# Altium PCB PS Digital Test v1.0.PcbDoc (part 1 of 3)
Units mil, origin at the board's own origin, x right, y up, seen from the top; angles counter-clockwise.
Board outline 3937.01 x 3937.01 mil, 4 copper layers (Top Layer, Signal Layer 1, Signal Layer 2, Bottom Layer), stack 55.634 mil thick; 120 components, 122 nets, 566 pads, 362 vias.
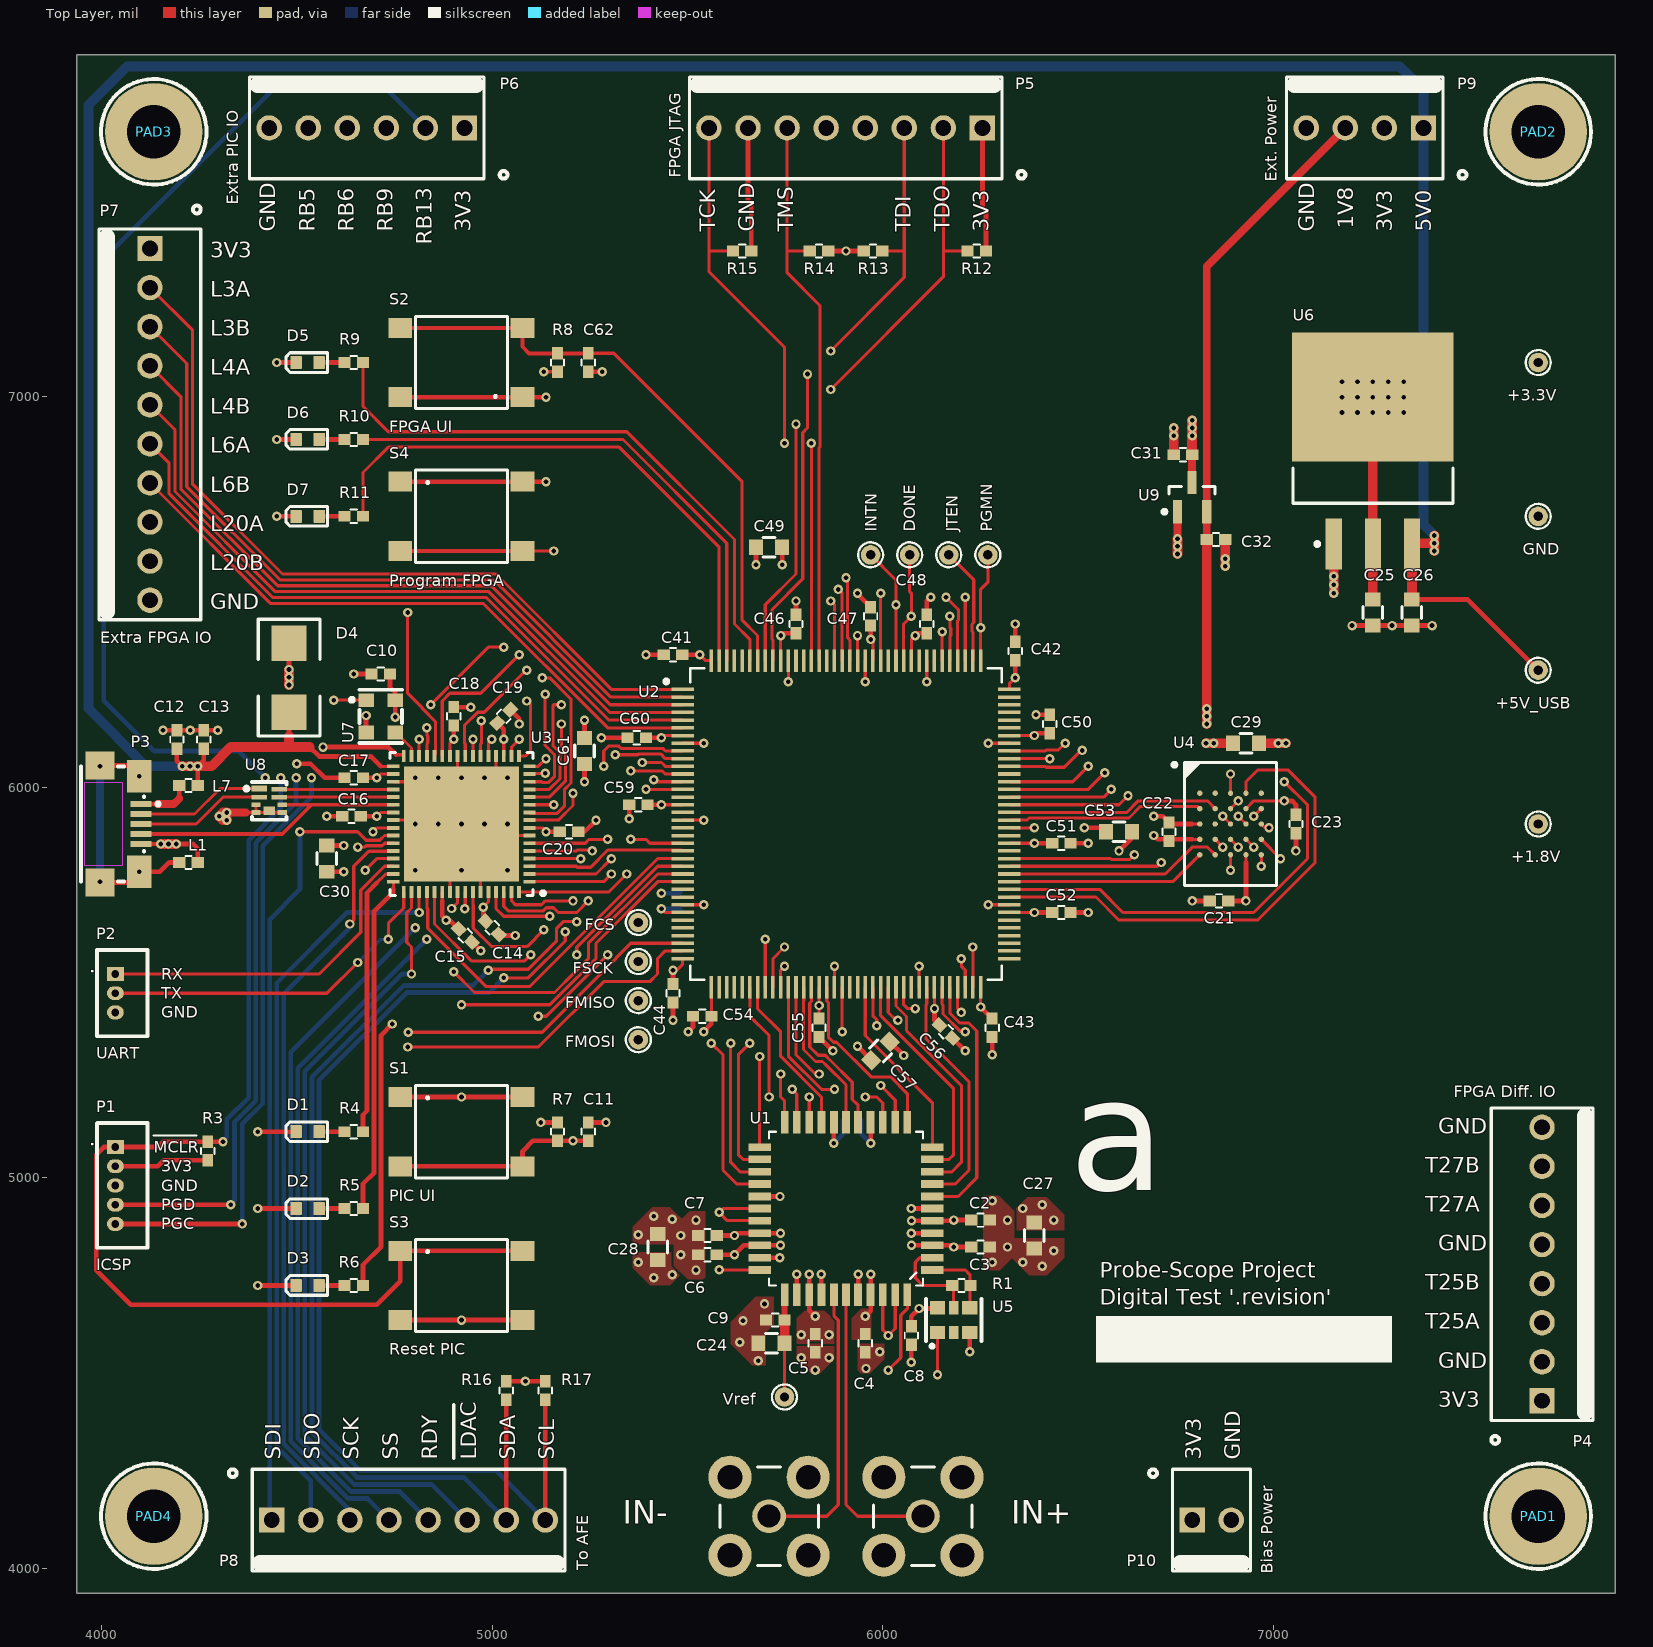
[diagram p0: Top Layer view]
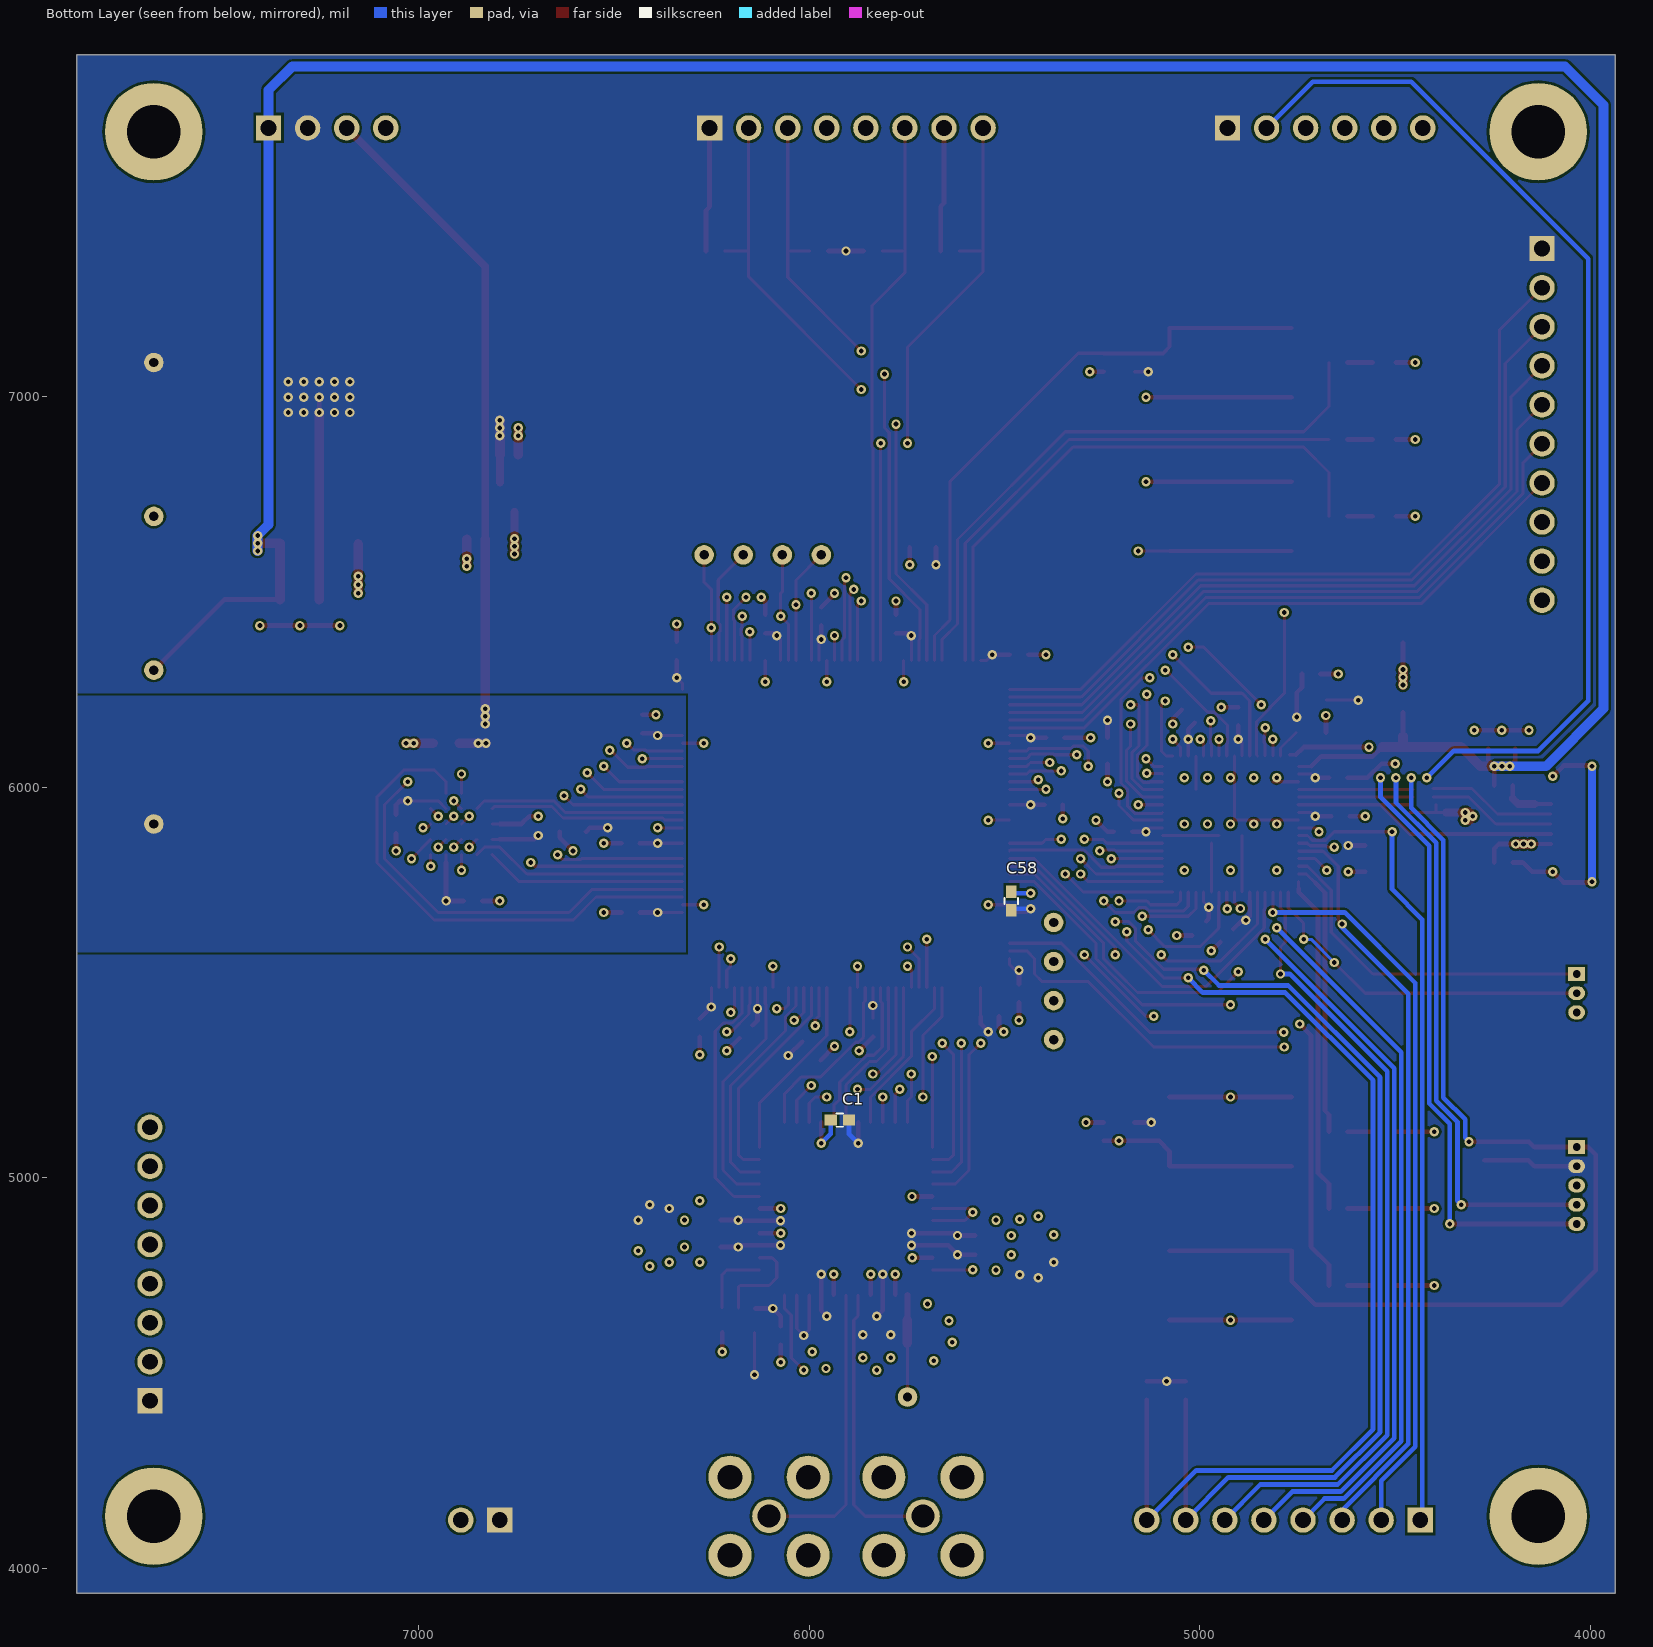
[diagram p1: Bottom Layer view, seen from below]
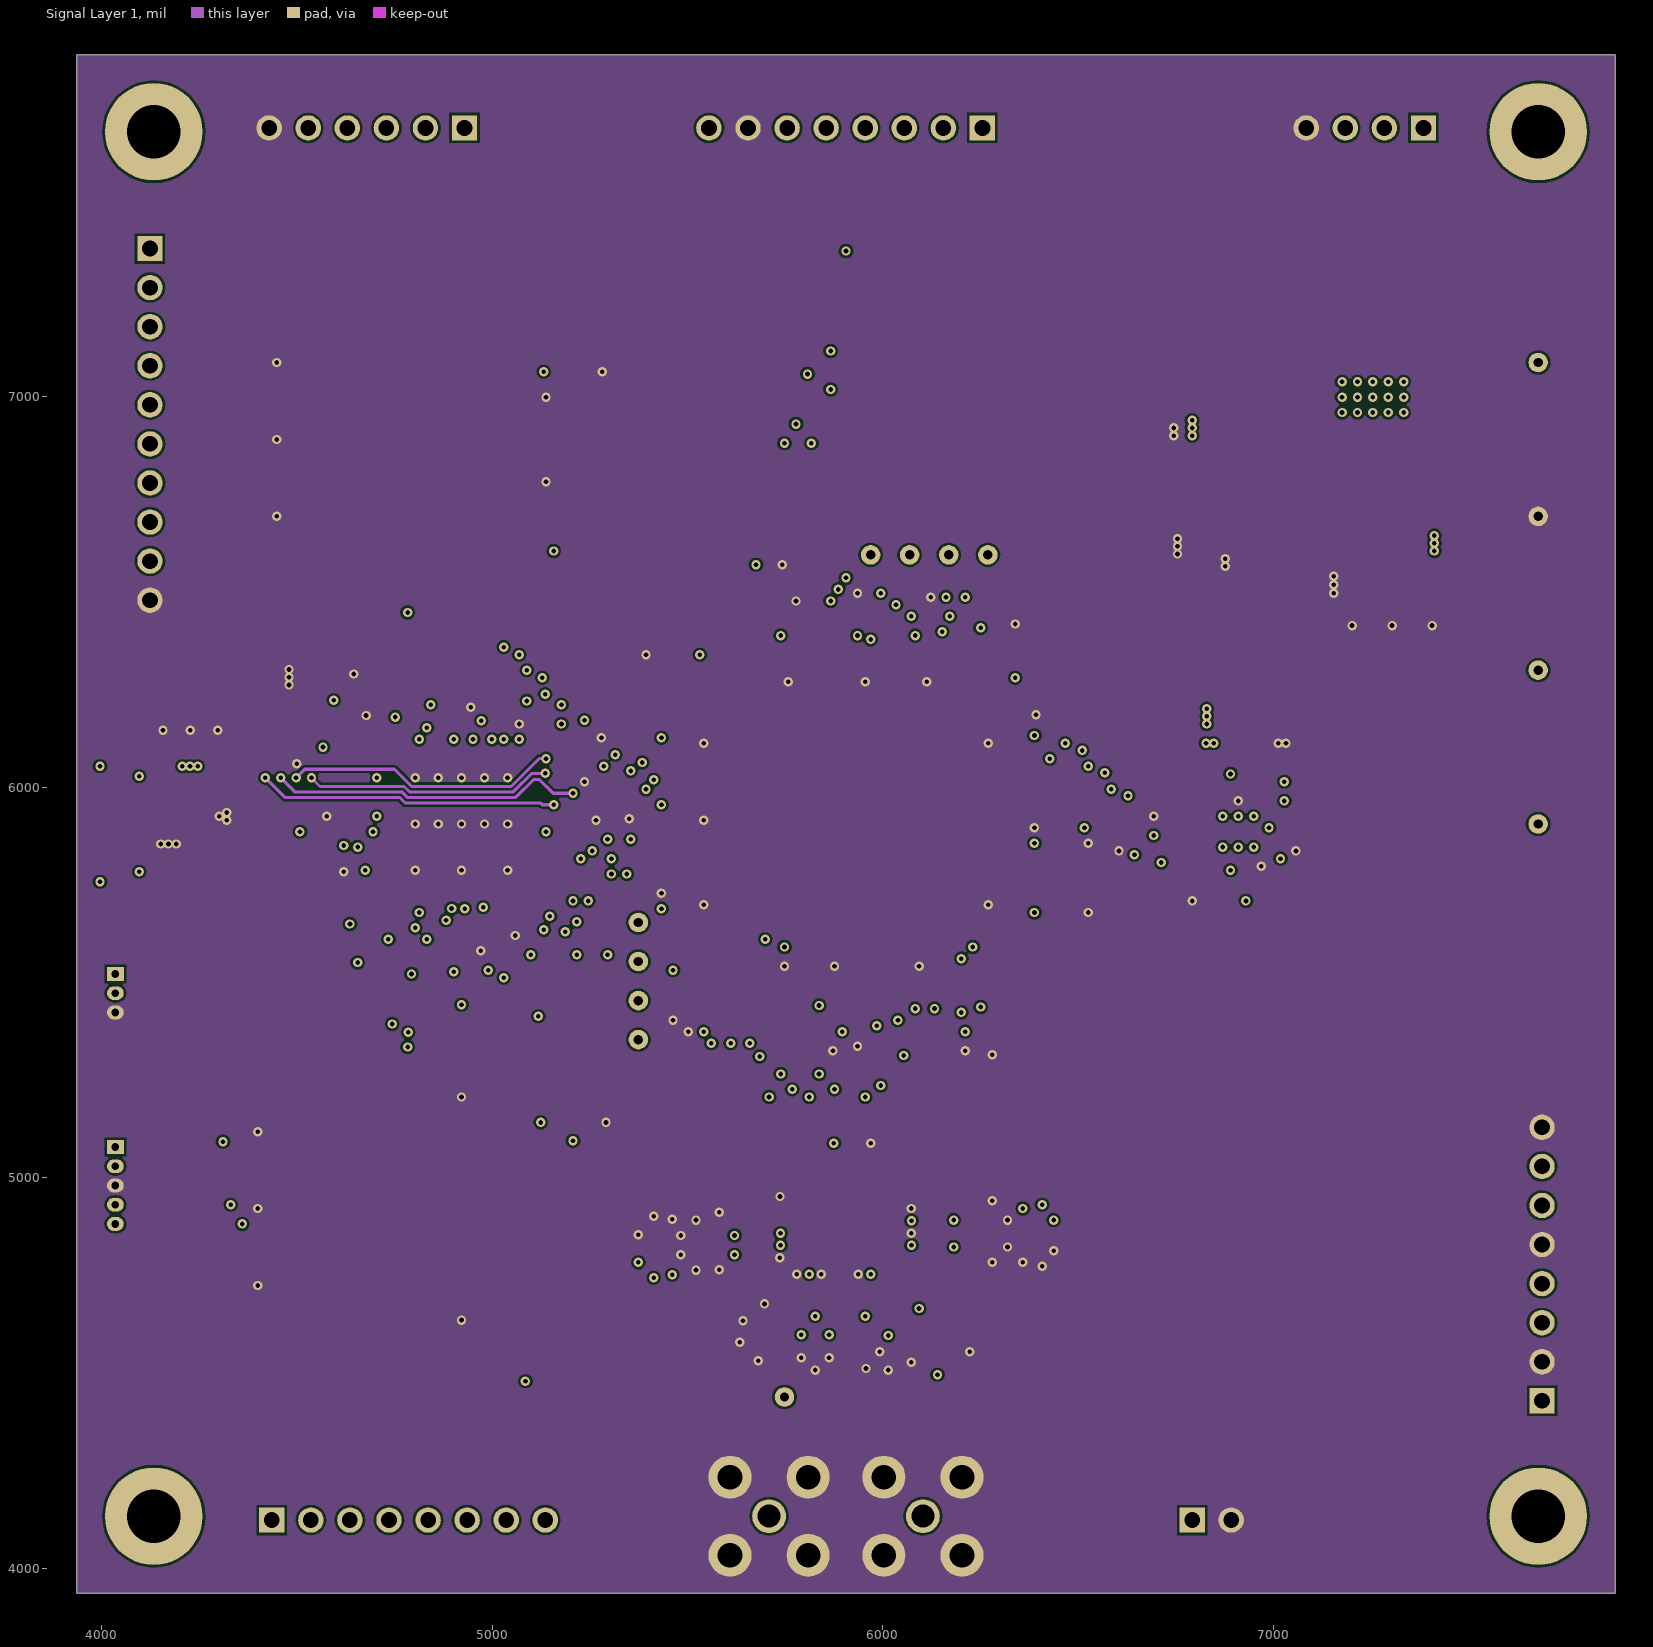
[diagram p2: Signal Layer 1]
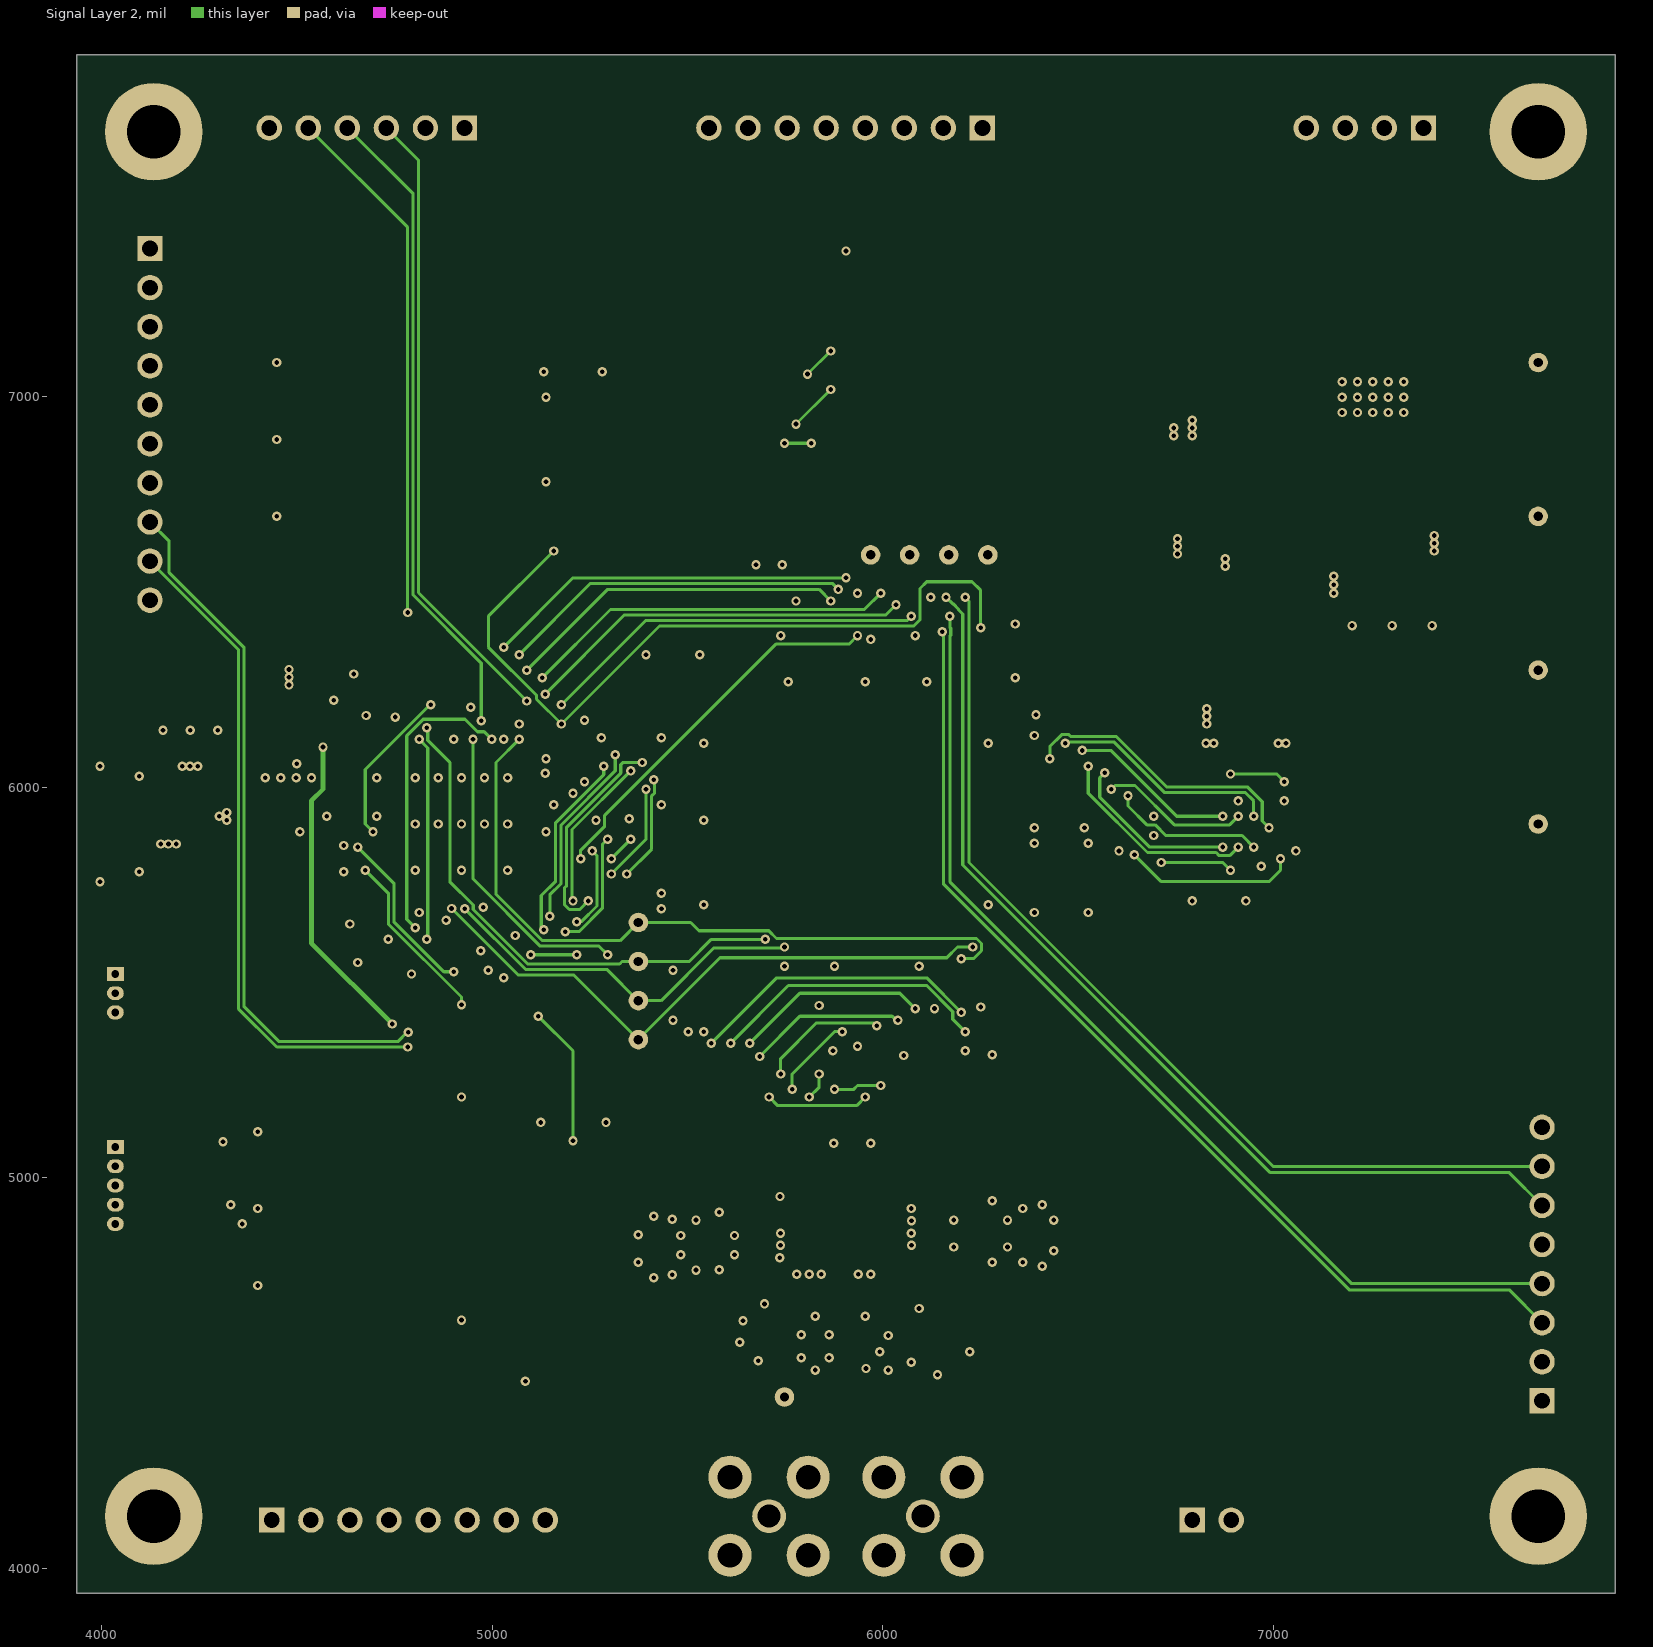
[diagram p3: Signal Layer 2]

## Layer stack, top to bottom
Top Solder: solder mask 0.4, Solder Resist, Dk 3.5
Top Layer: signal copper 1.4
Dielectric 1: prepreg 5, Dk 4.2
Signal Layer 1: signal copper 1.417
Dielectric 3: core 40, FR-4, Dk 4.2
Signal Layer 2: signal copper 1.417
Dielectric 2: prepreg 5, Dk 4.2
Bottom Layer: signal copper 1.4
Bottom Solder: solder mask 0.4, Solder Resist, Dk 3.5

## Board outline
3937.01,3937.01 7874.02,3937.01 7874.02,7874.02 3937.01,7874.02

## Design rules (kind name [scope] priority, off if disabled: settings)
Clearance BGAClearance [All vs HasFootprint('Cypress-VAA024')] p1: gap=7.88 ignorepadtopadclearanceinfootprint=FALSE except(0: Arc-Hole Track-Hole SMDPad-Hole THPad-Hole Via-Hole Fill-Hole Poly-Hole Region-Hole Text-Hole; 13.79: SMDPad-SMDPad)
Clearance [All] p2: gap=6 ignorepadtopadclearanceinfootprint=FALSE except(0: Arc-Hole Track-Hole SMDPad-Hole THPad-Hole Via-Hole Fill-Hole Poly-Hole Region-Hole Text-Hole)
DiffPairsRouting [All] p1: maxlimit=10 minlimit=6 mostfreqgap=8 toplayer_minwidth=6 toplayer_maxwidth=15 toplayer_prefwidth=8 midlayer1_minwidth=6 midlayer1_maxwidth=15 midlayer1_prefwidth=8 midlayer2_minwidth=6 midlayer2_maxwidth=15 midlayer2_prefwidth=8 bottomlayer_minwidth=6 bottomlayer_maxwidth=15 bottomlayer_prefwidth=8 maxuncoupledlength=500
HoleSize [All] p1: absolutevalues=TRUE maxlimit=200 minlimit=12 maxpercent=80.000 minpercent=20.000
HoleToHoleClearance ViaToViaClearance [IsVia vs IsVia] p1: gap=6 allowstackedmicrovias=TRUE
HoleToHoleClearance [All] p2: gap=10 allowstackedmicrovias=TRUE
PolygonConnect [All] p1: connectstyle=Direct reliefconductorwidth=10 reliefentries=4 polygonreliefangle="90 Angle" airgapwidth=10
RoutingVias [All] p1: holewidth=12 width=24 viastyle="Through Hole" minholewidth=12 minwidth=24 maxholewidth=28 maxwidth=50
SolderMaskExpansion [All] p1: expansion=4
Width [All] p1: maxlimit=100 minlimit=6 preferedwidth=8
27 further rules are at their usual default settings.

## Classes and differential pairs
net class "MEMDDR - 150mil": MEM_C\S\ MEM_CK_N MEM_CK_P MEM_D0 MEM_D1 MEM_D2 MEM_D3 MEM_D4 MEM_D5 MEM_D6 MEM_D7 MEM_PSC_N MEM_PSC_P MEM_R\E\S\E\T\ MEM_RWDS
net class "ADC_OSC - 37.5mil": ADC_OSC_N ADC_OSC_P
net class "ADC_CLK - 37.5mil": ADC_D1B ADC_DCO_N ADC_DCO_P
net class "ADC_DATA - 150mil": ADC_D0A ADC_D0B ADC_D1A ADC_D1B ADC_D2A ADC_D2B ADC_D3A ADC_D3B ADC_D4A ADC_D4B ADC_D5A ADC_D5B ADC_D6A ADC_D6B ADC_D7A ADC_D7B ADC_DCO_N ADC_DCO_P
component class "PSDT ADC v1.0.0": C1 C2 C3 C4 C5 C6 C7 C8 C9 C24 C27 C28 IN+ IN- R1 U1 U2 U5 Vref
component class "PSDT Controller v1.0.0": C10 C11 C12 C13 C14 C15 C16 C17 C18 C19 C20 C30 C62 D1 D2 D3 D5 D6 D7 DONE FCS FMISO FMOSI FSCK INTN JTEN L1 L7 P1 P2 P3 P4 P5 P6 P7 P8 PGMN R3 R4 R5 R6 R7 R8 R9 R10 R11 R12 R13 R14 R15 R16 R17 S1 S2 S3 S4 U3 U7 U8
component class "PSDT RAM v1.0.0": C21 C22 C23 C29 U4
component class "PSDT Power v1.0.0": +1.8V +3.3V +5V_USB C25 C26 C31 C32 C41 C42 C43 C44 C46 C47 C48 C49 C50 C51 C52 C53 C54 C55 C56 C57 C58 C59 C60 C61 D4 GND P9 P10 PAD1 PAD2 PAD3 PAD4 U6 U9
differential pair ADC_OSC: +ADC_OSC_P -ADC_OSC_N
differential pair ADC_IN: +ADC_IN_P -ADC_IN_N
differential pair ADC_DCO: +ADC_DCO_P -ADC_DCO_N
differential pair FDIO0: +FDIO0_P -FDIO0_N
differential pair FDIO1: +FDIO1_P -FDIO1_N

## Components (designator, comment, footprint, x,y, rotation, side; value= is the part's Value field where it differs from the comment)
+1.8V "TP" TESTPOINT024 7677.17,5905.51 r90 top
+3.3V "TP" TESTPOINT024 7677.17,7086.61 r90 top
+5V_USB "TP" TESTPOINT024 7677.17,6299.21 r90 top
C1 "6.3V" 0402(1005) 5921.26,5147.64 r180 bottom value=0.1uF
C2 "6.3V" 0402(1005) 6250,4891.73 r180 top value=0.1uF
C3 "6.3V" 0402(1005) 6250,4822.83 r180 top value=0.1uF
C4 "6.3V" 0402(1005) 5954.72,4576.77 r90 top value=0.1uF
C5 "6.3V" 0402(1005) 5826.77,4576.77 r90 top value=0.1uF
C6 "6.3V" 0402(1005) 5551.18,4803.15 r0 top value=0.1uF
C7 "6.3V" 0402(1005) 5551.18,4852.36 r0 top value=0.1uF
C8 "6.3V" 0402(1005) 6072.83,4596.46 r90 top value=0.1uF
C9 "6.3V" 0402(1005) 5724.41,4635.83 r0 top value=0.1uF
C10 "6.3V" 0402(1005) 4714.57,6289.37 r0 top value=0.1uF
C11 "6.3V" 0402(1005) 5246.06,5118.11 r270 top value=0.1uF
C12 "10V" 0402(1005) 4192.91,6122.05 r270 top value=1uF
C13 "6.3V" 0402(1005) 4261.81,6122.05 r270 top value=0.1uF
C14 "6.3V" 0402(1005) 5000,5639.76 r135 top value=0.1uF
C15 "6.3V" 0402(1005) 4931.1,5620.08 r135 top value=0.1uF
C16 "6.3V" 0402(1005) 4639.76,5925.2 r0 top value=0.1uF
C17 "6.3V" 0402(1005) 4645.67,6023.62 r0 top value=0.1uF
C18 "6.3V" 0402(1005) 4901.57,6181.1 r270 top value=0.1uF
C19 "6.3V" 0402(1005) 5029.53,6181.1 r225 top value=0.1uF
C20 "6.3V" 0402(1005) 5196.85,5885.83 r180 top value=0.1uF
C21 "6.3V" 0402(1005) 6860.24,5708.66 r0 top value=0.1uF
C22 "6.3V" 0402(1005) 6732.28,5885.83 r270 top value=0.1uF
C23 "6.3V" 0402(1005) 7057.09,5905.51 r90 top value=0.1uF
C24 "25V" 0603(1608) 5714.57,4576.77 r0 top value=10uF
C25 "25V" 0603(1608) 7253.94,6446.85 r90 top value=10uF
C26 "25V" 0603(1608) 7353.94,6446.85 r90 top value=10uF
C27 "25V" 0603(1608) 6387.8,4852.36 r90 top value=10uF
C28 "25V" 0603(1608) 5423.23,4822.83 r270 top value=10uF
C29 "25V" 0603(1608) 6929.13,6112.2 r180 top value=10uF
C30 "25V" 0603(1608) 4576.77,5816.93 r90 top value=10uF
C31 "10V" 0402(1005) 6767.72,6850.39 r0 top value=1uF
C32 "10V" 0402(1005) 6852.37,6633.86 r180 top value=1uF
C41 "6.3V" 0402(1005) 5462.6,6338.58 r0 top value=0.1uF
C42 "6.3V" 0402(1005) 6338.58,6348.43 r270 top value=0.1uF
C43 "6.3V" 0402(1005) 6279.53,5383.86 r90 top value=0.1uF
C44 "6.3V" 0402(1005) 5462.6,5472.44 r90 top value=0.1uF
C46 "6.3V" 0402(1005) 5777.56,6417.32 r270 top value=0.1uF
C47 "6.3V" 0402(1005) 5968.5,6437.01 r270 top value=0.1uF
C48 "6.3V" 0402(1005) 6112.2,6417.32 r270 top value=0.1uF
C49 "25V" 0603(1608) 5708.66,6614.17 r180 top value=10uF
C50 "6.3V" 0402(1005) 6427.17,6161.42 r270 top value=0.1uF
C51 "6.3V" 0402(1005) 6456.69,5856.3 r180 top value=0.1uF
C52 "6.3V" 0402(1005) 6456.69,5679.13 r180 top value=0.1uF
C53 "25V" 0603(1608) 6604.33,5885.83 r180 top value=10uF
C54 "6.3V" 0402(1005) 5537.4,5413.39 r0 top value=0.1uF
C55 "6.3V" 0402(1005) 5836.61,5383.86 r90 top value=0.1uF
C56 "6.3V" 0402(1005) 6161.42,5374.02 r135 top value=0.1uF
C57 "25V" 0603(1608) 5994.09,5324.8 r45 top value=10uF
C58 "6.3V" 0402(1005) 5482.28,5708.66 r270 bottom value=0.1uF
C59 "6.3V" 0402(1005) 5374.02,5954.72 r0 top value=0.1uF
C60 "6.3V" 0402(1005) 5370.08,6125.98 r0 top value=0.1uF
C61 "25V" 0603(1608) 5236.22,6092.52 r90 top value=10uF
C62 "6.3V" 0402(1005) 5246.06,7086.61 r90 top value=0.1uF
D1 "Green" "0603(1608) LED" 4527.56,5118.11 r180 top locked
D2 "Green" "0603(1608) LED" 4527.56,4921.26 r180 top locked
D3 "Green" "0603(1608) LED" 4527.56,4724.41 r180 top locked
D4 "6.5V" "SMB NP" 4480,6280 r270 top
D5 "Green" "0603(1608) LED" 4527.56,7086.61 r180 top locked
D6 "Green" "0603(1608) LED" 4527.56,6889.76 r180 top locked
D7 "Green" "0603(1608) LED" 4527.56,6692.91 r180 top locked
DONE "TP" TESTPOINT024 6068.5,6594.49 r135 top
FCS "TP" TESTPOINT024 5374.02,5653.5 r135 top
FMISO "TP" TESTPOINT024 5374.02,5453.5 r180 top
FMOSI "TP" TESTPOINT024 5374.02,5353.5 r180 top
FSCK "TP" TESTPOINT024 5374.02,5553.5 r45 top
GND "TP" TESTPOINT024 7677.17,6692.91 r0 top
IN+ "SMA" "TE SMA Stright" 6102.36,4133.86 r0 top locked
IN- "SMA" "TE SMA Stright" 5708.66,4133.86 r0 top locked
INTN "TP" TESTPOINT024 5968.5,6594.49 r135 top
JTEN "TP" TESTPOINT024 6168.5,6594.49 r135 top
L1 "Ferrite Bead" 0402(1005) 4222.44,5807.09 r180 top
L7 "Ferrite Bead" 0402(1005) 4222.44,6003.94 r0 top
P1 "ICSP" "MOLEX PICOBLADE 5 POS" 4035.43,4955.71 r90 top locked
P2 "UART" "MOLEX PICOBLADE 3 POS" 4035.43,5472.44 r90 top locked
P3 "Micro USB" "USB Micro B ZX62" 4101.38,5905.51 r270 top locked
P4 "FPGA Diff. IO" 0.1HDR1X8P 7687.01,4429.13 r90 top
P5 "FPGA JTAG" 0.1HDR1X8P 6254.72,7687.01 r180 top locked
P6 "Extra PIC IO" 0.1HDR1X6P 4929.13,7687.01 r180 top locked
P7 "Extra FPGA IO" 0.1HDR1X10P 4124.02,7378.35 r270 top locked
P8 "To AFE" 0.1HDR1X8P 4435.83,4124.02 r0 top locked
P9 "Ext. Power" 0.1HDR1X4P 7383.46,7687.01 r180 top locked
P10 "Bias Power" 0.1HDR1X2P 6790.28,4124.02 r0 top
PAD1 "4-40 Loose" "PAD-4-40 Loose" 7677.17,4133.86 r0 top locked
PAD2 "4-40 Loose" "PAD-4-40 Loose" 7677.17,7677.17 r0 top locked
PAD3 "4-40 Loose" "PAD-4-40 Loose" 4133.86,7677.17 r0 top locked
PAD4 "4-40 Loose" "PAD-4-40 Loose" 4133.86,4133.86 r0 top locked
PGMN "TP" TESTPOINT024 6268.5,6594.49 r135 top
R1 "Res1" 0402(1005) 6200.79,4724.41 r180 top value=100
R3 "0.1% 25ppm" 0402(1005) 4271.65,5068.9 r270 top value=10k
R4 "Res1" 0402(1005) 4645.67,5118.11 r180 top value=100
R5 "Res1" 0402(1005) 4645.67,4921.26 r180 top value=100
R6 "Res1" 0402(1005) 4645.67,4724.41 r180 top value=100
R7 "0.1% 25ppm" 0402(1005) 5167.32,5118.11 r270 top value=10k
R8 "0.1% 25ppm" 0402(1005) 5167.32,7086.61 r90 top value=10k
R9 "Res1" 0402(1005) 4645.67,7086.61 r180 top value=100
R10 "Res1" 0402(1005) 4645.67,6889.76 r180 top value=100
R11 "Res1" 0402(1005) 4645.67,6692.91 r180 top value=100
R12 "Res1" 0402(1005) 6240.16,7372.05 r0 top value=4.99k
R13 "Res1" 0402(1005) 5974.41,7372.05 r180 top value=4.99k
R14 "Res1" 0402(1005) 5836.61,7372.05 r0 top value=4.99k
R15 "Res1" 0402(1005) 5639.76,7372.05 r180 top value=4.99k
R16 "Res1" 0402(1005) 5035.83,4455.71 r90 top value=2.32k
R17 "Res1" 0402(1005) 5135.83,4455.71 r90 top value=2.32k
S1 "PIC UI" "PTS645 SMT" 4921.26,5118.11 r0 top locked
S2 "FPGA UI" "PTS645 SMT" 4921.26,7086.61 r180 top locked
S3 "Reset PIC" "PTS645 SMT" 4921.26,4724.41 r0 top locked
S4 "Program FPGA" "PTS645 SMT" 4921.26,6692.91 r0 top locked
U1 "AD9481BSUZ-250" QFP80P1200X1200X120-44N 5905.51,4921.26 r180 top locked
U2 "LCMXO2-4000" UL_TQFP144 5905.51,5905.51 r0 top locked
U3 "PIC32MZ2048EFH064" QFN50P900X900-64N 4921.26,5905.51 r180 top locked
U4 "S70KS128" Cypress-VAA024 6889.76,5905.51 r0 top locked
U5 "DSC1103" MCHP_H5A 6181.1,4635.83 r0 top
U6 "LD1086D2M33TR" "D2PAK TO263-4N" 7253.94,6860.24 r90 top
U7 "24MHz XO" DSC60xxC 4714.57,6181.1 r0 top
U8 "EMI2121" EMI2121 4429.13,5964.57 r270 top
U9 "1.8V" SOT23-12-3TOP 6791.34,6742.13 r90 top
Vref "TP" TESTPOINT024 5748.03,4438.98 r0 top

## Footprints (in the part's own frame and the unit in brackets; to place one, negate y for a bottom-side part, rotate by r counter-clockwise, add the part's x,y. Pads: shape width x height; smd on the part's side, far side on the other; paste and mask are expansions set on the pad)
0.1HDR1X2P [mil] "Connector; Header; 2 Position; Locking; Polarized"
  rect 65x65 hole 40: 1(1.06,0)
  round 65 hole 40: 2(101.06,0)
  silkscreen extent -109,-130 151,130
0.1HDR1X4P [mil] "Connector; Header; 4 Position; Locking; Polarized"
  rect 65x65 hole 40: 1(0,0)
  round 65 hole 40: 2(100,0) 3(200,0) 4(300,0)
  silkscreen extent -110,-130 350,130
0.1HDR1X6P [mil] "Connector; Header; 6 Position; Locking; Polarized"
  rect 65x65 hole 40: 1(0,0)
  round 65 hole 40: 2(100,0) 3(200,0) 4(300,0) 5(400,0) 6(500,0)
  silkscreen extent -110,-130 550,130
0.1HDR1X8P [mil] "Connector; Header; 6 Position; Locking; Polarized"
  rect 65x65 hole 40: 1(0,0)
  round 65 hole 40: 2(100,0) 3(200,0) 4(300,0) 5(400,0) 6(500,0) 7(600,0) 8(700,0)
  silkscreen extent -110,-130 750,130
0.1HDR1X10P [mil] "Connector; Header; 10 Position; Locking; Polarized"
  rect 65x65 hole 40: 1(0,0)
  round 65 hole 40: 2(100,0) 3(200,0) 4(300,0) 5(400,0) 6(500,0) 7(600,0) 8(700,0) 9(800,0) 10(900,0)
  silkscreen extent -110,-130 950,130
0402(1005) [mm] "Chip, Body 1.1x0.5mm, IPC Medium Density"
  rect 0.8x0.7 smd: 1(-0.6,0) 2(0.6,0)
  silkscreen extent -0.2,-0.43 0.2,0.43, body extent -0.55,-0.3 0.55,0.3, height 0.4
0603(1608) [mm] "Chip, Body 1.6x0.8mm, IPC Medium Density"
  rect 0.9x1 smd: 1(-0.85,0) 2(0.85,0)
  silkscreen extent -0.38,-0.64 0.38,0.64, body extent -0.85,-0.48 0.85,0.48, height 0.6
"0603(1608) LED" [mm] "0603 LED"
  rrect15% 0.75x0.85 smd: 1(-0.75,0) 2(0.75,0)
  silkscreen extent -1.3,-0.64 1.4,0.64, body extent -0.8,-0.4 0.8,0.4, height 0.5
Cypress-VAA024 [mm]
  round 0.35 smd: A1(-2,2) A2(-1,2) A3(0,2) A4(1,2) A5(2,2) B1(-2,1) B2(-1,1) B3(0,1) B4(1,1) B5(2,1) C1(-2,0) C2(-1,0) C3(0,0) C4(1,0) C5(2,0) D1(-2,-1) D2(-1,-1) D3(0,-1) D4(1,-1) D5(2,-1) E1(-2,-2) E2(-1,-2) E3(0,-2) E4(1,-2) E5(2,-2)
  silkscreen extent -3.77,-4 3,4, body extent -3,-4 3,4, height 1
"D2PAK TO263-4N" [mm] "D2-PAK, 4-Leads, Body 9.4x10.2mm, Pitch 2.54mm, Lead Span 14.3mm, IPC Medium Density"
  rect 3.3x1.05 smd: 1(-6.05,2.54) 2(-6.05,0) 3(-6.05,-2.54)
  rect 8.4x10.5 smd: 4(3.5,0)
  silkscreen extent -6.17,-5.2 -1.1,5.2, body extent -3.4,-5.2 6,5.2, height 4.65
DSC60xxC [mm] "Microchip DSC60xxCxxx-xxx.xxxx MEMS Oscillator, DFN-4"
  rect 1x0.9 smd: 1(-0.95,1.05) 2(-0.95,-1.05) 3(0.95,-1.05) 4(0.95,1.05)
  silkscreen extent -2,-1.73 1.38,1.73, body extent -1.25,-1.6 1.25,1.6, height 0.85
EMI2121 [mm] "ON Semi EMI2121 USB EMI Filter"
  rect 0.54x0.742 smd mask+0.075: 0(0.63,0)
  rect 0.4x1 smd mask+0.08: 1(-0.8,-0.65)
  rect 0.3x1 smd mask+0.08: 2(-0.25,-0.65) 7(-0.25,0.65) 8(-0.75,0.65)
  rect 0.3x0.6 smd mask+0.075: 3(0.25,-0.85) 4(0.75,-0.85) 5(0.75,0.85) 6(0.25,0.85)
  silkscreen extent -1.22,-1.6 1.23,1.12, body extent -1.1,-1 1.1,1, height 0.75
MCHP_H5A [mm] "6-VDFN, 3.2x2.5mm (Microchip Case H5A)"
  rect 1x0.85 smd mask+0.09: 1(-1.05,-0.8) 3(1.05,-0.8) 4(1.05,0.8) 6(-1.05,0.8)
  rect 0.6x0.85 smd mask+0.09: 2(0,-0.8) 5(0,0.8)
  silkscreen extent -1.8,-1.8 1.8,1.38, body extent -1.6,-1.25 1.6,1.25, height 0.85
"MOLEX PICOBLADE 3 POS" [mm] "Molex Picoblade 3 pos, 1.25mm pitch, PN 53047-0310"
  rect 0.9x1.1 hole 0.5: 1(1.25,0)
  oval 0.9x1.1 hole 0.5: 2(0,0) 3(-1.25,0)
  silkscreen extent -2.8,-2.1 2.8,1.2, body extent -2.75,-2.05 2.75,1.15, height 4.2
"MOLEX PICOBLADE 5 POS" [mm] "Molex Picoblade 5 pos, 1.25mm pitch, PN 53047-0510"
  rect 0.9x1.1 hole 0.5: 1(3.125,0)
  oval 0.9x1.1 hole 0.5: 2(1.875,0) 3(0.625,0) 4(-0.625,0) 5(-1.875,0)
  silkscreen extent -3.42,-2.1 4.67,1.2, body extent -3.3,-2.05 4.62,1.2, height 4.2
"PAD-4-40 Loose" [mil] "Pad for #4 Screw"
  round 250 hole 136: 1(0,0)
  silkscreen extent -135,-135 135,135
"PTS645 SMT" [mm] "C&K PTS645 SMD Tactile Switch"
  rect 1.55x1.3 smd: 1(-3.975,2.25) 1(3.975,2.25) 2(-3.975,-2.25) 2(3.975,-2.25)
  silkscreen extent -3,-3 3,3, body extent -3,-3 3,3, height 4.3
QFN50P900X900-64N [mm] "QFN, 64-Leads, Body 9.00x9.00mm, Pitch 0.50mm, IPC Medium Density"
  rect 0.8x0.25 smd: 1(-4.425,3.75) 2(-4.425,3.25) 3(-4.425,2.75) 4(-4.425,2.25) 5(-4.425,1.75) 6(-4.425,1.25) 7(-4.425,0.75) 8(-4.425,0.25) 9(-4.425,-0.25) 10(-4.425,-0.75) 11(-4.425,-1.25) 12(-4.425,-1.75) 13(-4.425,-2.25) 14(-4.425,-2.75) 15(-4.425,-3.25) 16(-4.425,-3.75) 33(4.425,-3.75) 34(4.425,-3.25) 35(4.425,-2.75) 36(4.425,-2.25) 37(4.425,-1.75) 38(4.425,-1.25) 39(4.425,-0.75) 40(4.425,-0.25) 41(4.425,0.25) 42(4.425,0.75) 43(4.425,1.25) 44(4.425,1.75) 45(4.425,2.25) 46(4.425,2.75) 47(4.425,3.25) 48(4.425,3.75)
  rect 0.25x0.8 smd: 17(-3.75,-4.425) 18(-3.25,-4.425) 19(-2.75,-4.425) 20(-2.25,-4.425) 21(-1.75,-4.425) 22(-1.25,-4.425) 23(-0.75,-4.425) 24(-0.25,-4.425) 25(0.25,-4.425) 26(0.75,-4.425) 27(1.25,-4.425) 28(1.75,-4.425) 29(2.25,-4.425) 30(2.75,-4.425) 31(3.25,-4.425) 32(3.75,-4.425) 49(3.75,4.425) 50(3.25,4.425) 51(2.75,4.425) 52(2.25,4.425) 53(1.75,4.425) 54(1.25,4.425) 55(0.75,4.425) 56(0.25,4.425) 57(-0.25,4.425) 58(-0.75,4.425) 59(-1.25,4.425) 60(-1.75,4.425) 61(-2.25,4.425) 62(-2.75,4.425) 63(-3.25,4.425) 64(-3.75,4.425)
  rect 7.5x7.5 smd: 65(0,0)
  silkscreen extent -5.43,-4.65 4.65,4.65, body extent -4.5,-4.5 4.5,4.5, height 0.9
QFP80P1200X1200X120-44N [mil]
  rect 58x20 smd: 1(-221,157) 2(-221,126) 3(-221,94) 4(-221,63) 5(-221,31) 6(-221,0) 7(-221,-31) 8(-221,-63) 9(-221,-94) 10(-221,-126) 11(-221,-157) 23(221,-157) 24(221,-126) 25(221,-94) 26(221,-63) 27(221,-31) 28(221,0) 29(221,31) 30(221,63) 31(221,94) 32(221,126) 33(221,157)
  rect 20x58 smd: 12(-157,-221) 13(-126,-221) 14(-94,-221) 15(-63,-221) 16(-31,-221) 17(0,-221) 18(31,-221) 19(63,-221) 20(94,-221) 21(126,-221) 22(157,-221) 34(157,221) 35(126,221) 36(94,221) 37(63,221) 38(31,221) 39(0,221) 40(-31,221) 41(-63,221) 42(-94,221) 43(-126,221) 44(-157,221)
  silkscreen extent -197,-197 197,197, body extent -197,-197 197,197, height 20
"SMB NP" [mm] "DO-214-AA/SMB; 2 C-Bend Leads; Body 5.3 x 3.6 mm, inc. leads (LxW)"
  rect 2.3x2.3 smd: 1(-2.25,0) 2(2.25,0)
  silkscreen extent -3.8,-2 3.8,2, body extent -2.5,-2 2.5,2, height 2.54
SOT23-12-3TOP [mm] "SOT23, 3-Leads, Body 2.9x1.3mm, Pitch 0.95mm, Lead Span 2.5mm, IPC Medium Density"
  rect 1.5x0.6 smd: 1(-0.95,0.95) 2(-0.95,-0.95) 3(0.95,0)
  silkscreen extent -1.07,-1.5 0.7,1.92, body extent -0.7,-1.5 0.7,1.5, height 1.1
"TE SMA Stright" [mm] "Connector; RF Coaxial, MCX, Thru-Hole; 5 Position; Vertical"
  round 2.2 hole 1.5 mask+0.07: 1(0,0)
  round 2.8 hole 1.6: 2(-2.54,-2.54) 2(-2.54,2.54) 2(2.54,-2.54) 2(2.54,2.54)
  silkscreen extent -3.2,-3.2 3.2,3.2, body extent -3.2,-3.2 3.2,3.2, height 7.8
TESTPOINT024 [mil]
  round 50 hole 24: 1(0,0)
  silkscreen extent -32,-32 32,32
UL_TQFP144 [mil]
  rect 58x9 smd paste+0: 1(-418,344.49) 2(-418,324.8) 3(-418,305.12) 4(-418,285.43) 5(-418,265.75) 6(-418,246.06) 7(-418,226.38) 8(-418,206.69) 9(-418,187.01) 10(-418,167.32) 11(-418,147.64) 12(-418,127.95) 13(-418,108.27) 14(-418,88.58) 15(-418,68.9) 16(-418,49.21) 17(-418,29.53) 18(-418,9.84) 19(-418,-9.84) 20(-418,-29.53) 21(-418,-49.21) 22(-418,-68.9) 23(-418,-88.58) 24(-418,-108.27) 25(-418,-127.95) 26(-418,-147.64) 27(-418,-167.32) 28(-418,-187.01) 29(-418,-206.69) 30(-418,-226.38) 31(-418,-246.06) 32(-418,-265.75) 33(-418,-285.43) 34(-418,-305.12) 35(-418,-324.8) 36(-418,-344.49) 73(418,-344.49) 74(418,-324.8) 75(418,-305.12) 76(418,-285.43) 77(418,-265.75) 78(418,-246.06) 79(418,-226.38) 80(418,-206.69) 81(418,-187.01) 82(418,-167.32) 83(418,-147.64) 84(418,-127.95) 85(418,-108.27) 86(418,-88.58) 87(418,-68.9) 88(418,-49.21) 89(418,-29.53) 90(418,-9.84) 91(418,9.84) 92(418,29.53) 93(418,49.21) 94(418,68.9) 95(418,88.58) 96(418,108.27) 97(418,127.95) 98(418,147.64) 99(418,167.32) 100(418,187.01) 101(418,206.69) 102(418,226.38) 103(418,246.06) 104(418,265.75) 105(418,285.43) 106(418,305.12) 107(418,324.8) 108(418,344.49)
  rect 9x58 smd paste+0: 37(-344.49,-418) 38(-324.8,-418) 39(-305.12,-418) 40(-285.43,-418) 41(-265.75,-418) 42(-246.06,-418) 43(-226.38,-418) 44(-206.69,-418) 45(-187.01,-418) 46(-167.32,-418) 47(-147.64,-418) 48(-127.95,-418) 49(-108.27,-418) 50(-88.58,-418) 51(-68.9,-418) 52(-49.21,-418) 53(-29.53,-418) 54(-9.84,-418) 55(9.84,-418) 56(29.53,-418) 57(49.21,-418) 58(68.9,-418) 59(88.58,-418) 60(108.27,-418) 61(127.95,-418) 62(147.64,-418) 63(167.32,-418) 64(187.01,-418) 65(206.69,-418) 66(226.38,-418) 67(246.06,-418) 68(265.75,-418) 69(285.43,-418) 70(305.12,-418) 71(324.8,-418) 72(344.49,-418) 109(344.49,418) 110(324.8,418) 111(305.12,418) 112(285.43,418) 113(265.75,418) 114(246.06,418) 115(226.38,418) 116(206.69,418) 117(187.01,418) 118(167.32,418) 119(147.64,418) 120(127.95,418) 121(108.27,418) 122(88.58,418) 123(68.9,418) 124(49.21,418) 125(29.53,418) 126(9.84,418) 127(-9.84,418) 128(-29.53,418) 129(-49.21,418) 130(-68.9,418) 131(-88.58,418) 132(-108.27,418) 133(-127.95,418) 134(-147.64,418) 135(-167.32,418) 136(-187.01,418) 137(-206.69,418) 138(-226.38,418) 139(-246.06,418) 140(-265.75,418) 141(-285.43,418) 142(-305.12,418) 143(-324.8,418) 144(-344.49,418)
  silkscreen extent -465,-398 398,398, body extent -394,-394 394,394, height 59
"USB Micro B ZX62" [mm] "USB Micro B, Hirsoe ZX62"
  rect 0.4x1.35 smd: 1(-1.3,0) 2(-0.65,0) 3(0,0) 4(0.65,0) 5(1.3,0)
  rect 1.8x1.9 smd: 6(-3.8,-2.675) 6(3.8,-2.675)
  rect 2.1x1.6 smd: 6(-3.1,-0.125) 6(3.1,-0.125)
  Top Layer keep-out region: -2.692,-3.7 2.693,-3.7 2.693,-1.2 -2.692,-1.2
  silkscreen extent -3.75,-3.9 3.75,1.2, body extent -3.98,-5.38 3.98,0.18, height 2.8

## Part data
+1.8V +3.3V +5V_USB DONE FCS FMISO FMOSI FSCK GND INTN JTEN PGMN Vref: library part 49, Approved=True, Class=Connector, Date Modified="9/30/2014 10:31:54 AM", Key=49, MANF="Keystone Electronics", MANF_PN=1998-3, MENG_PN=CON00002, Modified By=sotterbacher, Other="Small, 0.27\" Straight Pin, 0.02\" dia", P&V Description="Connector, Test Point, 1 Positions, Male, Small, 0.27\" Straight Pin, 0.02\" dia", Parent Key=49, Positions=1, Sex=Male, SMD=False, Type="Test Point", VENDOR=Digikey, VENDOR_PN=1998-3K-ND, Verified=True
C1 C2 C3 C4 C5 C6 C7 C8 C9 C10 C11 C13 C14 C15 C16 C17 C18 C19 C20 C21 C22 C23 C41 C42 C43 C44 C46 C47 C48 C50 C51 C52 C54 C55 C56 C58 C59 C60 C62: library part 1875, Max Temperature=125, Package=0402, Tolerance=10, Voltage=6.3, Approved=False, Class=Capacitor, Date Modified="11/6/2018 11:14:02 AM", Key=1875, MANF="Samsung Electro-Mechanics", MANF_PN=CL05B104KQ5NNNC, MENG_PN=???1875, Modified By=jrowley, Other=X7R, P&V Description="Capacitor, Ceramic, 0.1uF, 6.3V, 10% Tol, 125C, X7R, 0402, SMD", Parent Key=1875, SMD=True, Type=Ceramic, VENDOR=Digikey, VENDOR_PN=1276-1511-1-ND, Verified=False
C12 C31 C32: library part 1876, Max Temperature=125, Package=0402, Tolerance=10, Approved=False, Class=Capacitor, Date Modified="11/6/2018 11:19:13 AM", Key=1876, MANF="Murata Electronics", MANF_PN=GCM155C71A105KE38D, MENG_PN=???1876, Modified By=jrowley, Other=X7S, P&V Description="Capacitor, Ceramic, 1uF, 10V, 10% Tol, 125C, X7S, 0402, SMD", Parent Key=1876, SMD=True, Type=Ceramic, VENDOR=Digikey, VENDOR_PN=490-13409-1-ND, Verified=False, Voltage=10
C24 C25 C26 C27 C28 C29 C30 C49 C53 C57 C61: library part 1306, Max Temperature=85, Package=0603, Tolerance=20, Voltage=25, Approved=True, Class=Capacitor, Date Modified="3/3/2015 11:08:29 AM", Key=1306, MANF="Samsung Electro-Mechanics", MANF_PN=CL10A106MA8NRNC, MENG_PN=???1306, Modified By=sotterbacher, Other=X5R, P&V Description="Capacitor, Ceramic, 10uF, 25V, 20% Tol, 85C, X5R, 0603, SMD", Parent Key=1306, SMD=True, Type=Ceramic, VENDOR=Digikey, VENDOR_PN=1276-1869-1-ND, Verified=True
D1 D2 D3 D5 D6 D7: library part 798, Current=0.02, Package=0603, Voltage=1.7, Approved=True, Class=LED, Date Modified="11/4/2014 3:14:11 PM", Key=798, MANF=OSRAM, MANF_PN="LG L29K-F2J1-24", MENG_PN=???798, Modified By=pmarcus, Other="Green, 570nm, diffused", P&V Description="LED, 1.7V, 0.02A, Green, 570nm, diffused, 0603, SMD", Parent Key=798, SMD=True, VENDOR=Digikey, VENDOR_PN=475-1193-1-ND, Verified=True
D4: library part 1447, Current=53.6, Package=SMB, Power=600, Voltage=6.5, Approved=True, Class=Diode, Date Modified="4/13/2016 2:45:26 PM", Key=1447, MANF=Littelfuse, MANF_PN=SMBJ6.5A, MENG_PN=???1447, Modified By=tgage, Other="V breakdoen min 7.22V, Voltage Clamping Max 11.2V, Unidirectional Zener Clamp, TVS, Circuit Protection", P&V Description="Diode, Transzorb, 6.5V, 53.6A, 600W, V breakdoen min 7.22V, Voltage Clamping Max 11.2V, Unidirectional Zener Clamp, TVS, Circuit Protection, SMB, SMD", Parent Key=1447, SMD=True, Type=Transzorb, VENDOR=Digikey, VENDOR_PN=SMBJ6.5ALFCT-ND, Verified=True
IN+ IN-: library part 968, Approved=True, Class=Connector, Date Modified="5/28/2013 3:41:34 PM", Key=968, MANF="TE Connectivity", MANF_PN=5-1814832-1, MENG_PN=???968, Modified By=rlaity, Other="Vertical.  50 Ohm.  3 GHz.", P&V Description="Connector, SMA, 1 Positions, Female, Vertical.  50 Ohm.  3 GHz.", Parent Key=968, Positions=1, Sex=Female, SMD=False, Type=SMA, VENDOR=Digikey, VENDOR_PN=A97594-ND, Verified=True
L1 L7: library part 1818, Current=1.2, Package=0402, Approved=False, Class=Inductor, Date Modified="8/28/2018 10:47:21 PM", Key=1818, MANF=Murata, MANF_PN=BLM15PX331SN1D, MENG_PN=???1818, Modified By=jrowley, Other="330 Ohm at 100MHz", P&V Description="Inductor, Ferrite Bead, 1.2A, 330 Ohm at 100MHz, 0402, SMD", Parent Key=1818, SMD=True, Type="Ferrite Bead", VENDOR=Digikey, VENDOR_PN=490-11022-1-ND, Verified=False
P1: library part 1316, Current=1, Voltage=125, Approved=True, Class=Connector, Date Modified="4/3/2015 6:22:35 PM", Key=1316, MANF=Molex, MANF_PN=53047-0510, MENG_PN=???1316, Modified By=pmarcus, Other="Vert, Through Hole, Locking, Tin", P&V Description="Connector, PicoBlade, 5 Positions, Male, 0.049\" Spacing, 1A, 125V, Vert, Through Hole, Locking, Tin", Parent Key=1316, Positions=5, Sex=Male, SMD=False, Spacing=0.049, Type=PicoBlade, VENDOR=Digikey, VENDOR_PN=WM1734-ND, Verified=True
P2: library part 1286, Current=1, Voltage=125, Approved=True, Class=Connector, Date Modified="2/19/2015 4:08:35 PM", Key=1286, MANF=Molex, MANF_PN=53047-0310, MENG_PN=???1286, Modified By=rlaity, Other="Vert, Through Hole, Locking, Tin", P&V Description="Connector, PicoBlade, 3 Positions, Male, 0.049\" Spacing, 1A, 125V, Vert, Through Hole, Locking, Tin", Parent Key=1286, Positions=3, Sex=Male, SMD=False, Spacing=0.049, Type=PicoBlade, VENDOR=Digikey, VENDOR_PN=WM1732-ND, Verified=True
P3: library part 1830, Current=1.8, Voltage=100, Approved=False, Class=Connector, Date Modified="8/31/2018 2:15:27 PM", Key=1830, MANF="Amphenol FCI", MANF_PN=10118192-0002LF, MENG_PN=???1830, Modified By=jrowley, Other="USB - micro B USB 2.0 Receptacle Connector 5 Position Surface Mount, Right Angle, Without Flange", P&V Description="Connector, USB, 5 Positions, Female, 0.026\" Spacing, 1.8A, 100V, USB - micro B USB 2.0 Receptacle Connector 5 Position Surface Mount, Right Angle, Without Flange, SMD", Parent Key=1830, Positions=5, Sex=Female, SMD=True, Spacing=0.026, Type=USB, VENDOR=Digikey, VENDOR_PN=609-5379-1-ND, Verified=False
P4 P5 P8: library part 152, Current=4, Voltage=250, Approved=False, Class=Connector, Date Modified="7/21/2017 2:27:29 PM", Key=152, MANF=Molex, MANF_PN=22-11-2082, MENG_PN=CON00027, Modified By=jrowley, Other="Vertical, 0.24\" Long, 0.125\" Tail, 15u\" Select Gold, Polarized, Locking Ramp", P&V Description="Connector, Header, 0.1\", 8 Positions, Male, 0.1\" Spacing, 4A, 250V, Vertical, 0.24\" Long, 0.125\" Tail, 15u\" Select Gold, Polarized, Locking Ramp", Parent Key=152, Positions=8, Sex=Male, SMD=False, Spacing=0.1, Type="Header, 0.1\"", VENDOR=Digikey, VENDOR_PN=WM2706-ND, Verified=False
P6: library part 51, Current=4, Voltage=250, Approved=False, Class=Connector, Date Modified="7/21/2017 2:26:33 PM", Key=51, MANF=Molex, MANF_PN=22-11-2062, MENG_PN=CON00013, Modified By=jrowley, Other="0.24\" Long, 0.125\" Tail, 15u\" Select Gold, Polarized, Locking Ramp, Vertical", P&V Description="Connector, Header, 0.1\", 6 Positions, Male, 0.1\" Spacing, 4A, 250V, 0.24\" Long, 0.125\" Tail, 15u\" Select Gold, Polarized, Locking Ramp, Vertical", Parent Key=51, Positions=6, Sex=Male, SMD=False, Spacing=0.1, Type="Header, 0.1\"", VENDOR=Digikey, VENDOR_PN=WM2704-ND, Verified=False
P7: library part 275, Current=4, Voltage=250, Approved=False, Class=Connector, Date Modified="7/21/2017 2:28:18 PM", Key=275, MANF=Molex, MANF_PN=22-11-2102, MENG_PN=CON00037, Modified By=jrowley, Other="Vertical, 0.24\" Long, 0.125\" Tail, 15u\" Select Gold, Polarized, Locking Ramp", P&V Description="Connector, Header, 0.1\", 10 Positions, Male, 0.1\" Spacing, 4A, 250V, Vertical, 0.24\" Long, 0.125\" Tail, 15u\" Select Gold, Polarized, Locking Ramp", Parent Key=275, Positions=10, Sex=Male, SMD=False, Spacing=0.1, Type="Header, 0.1\"", VENDOR=Digikey, VENDOR_PN=WM2708-ND, Verified=False
P9: library part 163, Current=4, Voltage=250, Approved=False, Class=Connector, Date Modified="7/21/2017 2:27:52 PM", Key=163, MANF=Molex, MANF_PN=22-11-2042, MENG_PN=CON00029, Modified By=jrowley, Other="0.24\" Long, 0.125\" Tail, 15u\" Select Gold, Polarized, Locking Ramp, Vert", P&V Description="Connector, Header, 0.1\", 4 Positions, Male, 0.1\" Spacing, 4A, 250V, 0.24\" Long, 0.125\" Tail, 15u\" Select Gold, Polarized, Locking Ramp, Vert", Parent Key=163, Positions=4, Sex=Male, SMD=False, Spacing=0.1, Type="Header, 0.1\"", VENDOR=Digikey, VENDOR_PN=WM2702-ND, Verified=False
P10: library part 375, Current=4, Voltage=250, Approved=False, Class=Connector, Date Modified="7/21/2017 2:28:28 PM", Key=375, MANF=Molex, MANF_PN=22-11-2022, MENG_PN=CON00068, Modified By=jrowley, Other="0.24\" Long, 0.125\" Tail, 15u Select Gold, Polarized, Locking Ramp", P&V Description="Connector, Header, 0.1\", 2 Positions, Male, 0.1\" Spacing, 4A, 250V, 0.24\" Long, 0.125\" Tail, 15u Select Gold, Polarized, Locking Ramp", Parent Key=375, Positions=2, Sex=Male, SMD=False, Spacing=0.1, Type="Header, 0.1\"", VENDOR=Digikey, VENDOR_PN=WM2700-ND, Verified=False
PAD1 PAD2 PAD3 PAD4: library part 671, Approved=True, Class=Fabrication, Date Modified="11/19/2010 2:33:14 PM", Key=671, MANF=dummy, MANF_PN=000-671, MENG_PN=???671, Modified By=pmarcus, Other="4-40 Pad, Loose Fit, Not a Part", P&V Description="Fabrication, Hole, 4-40 Pad, Loose Fit, Not a Part", Parent Key=671, SMD=False, Type=Hole, VENDOR=dummy, Verified=True
R1 R4 R5 R6 R9 R10 R11: library part 1823, Package=0402, Power=0.0625, Tolerance=1, Voltage=100, Approved=False, Class=Resistor, Date Modified="8/29/2018 2:46:23 AM", Expr1026=1823, Key=1823, MANF=Yageo, MANF_PN=RC0402FR-07100RL, MENG_PN=???1823, Modified By=jrowley, P&V Description="Resistor, Thick Film, 100 Ohms, 0.0625W, 1% Tol, 100V, 0402, SMD", Parent Key=1823, SMD=True, Type="Thick Film", VENDOR=Digikey, VENDOR_PN=311-100LRCT-ND, Verified=False
R3 R7 R8: library part 1806, Package=0402, Power=0.0625, Tolerance=1, Voltage=100, Approved=False, Class=Resistor, Date Modified="8/27/2018 6:34:02 PM", Expr1026=1806, Key=1806, MANF="Stackpole Electronics", MANF_PN=RMCF0402FT10K0, MENG_PN=???1806, Modified By=jrowley, P&V Description="Resistor, Thick Film, 10k Ohms, 0.0625W, 1% Tol, 100V, 0402, SMD", Parent Key=1806, SMD=True, Type="Thick Film", VENDOR=Digikey, VENDOR_PN=RMCF0402FT10K0CT-ND, Verified=False
R12 R13 R14 R15: library part 1871, Package=0402, Power=0.063, Tolerance=1, Approved=False, Class=Resistor, Date Modified="11/5/2018 1:44:43 PM", Expr1026=1871, Key=1871, MANF=Yageo, MANF_PN=RC0402FR-074K99L, MENG_PN=???1871, Modified By=khall, Other="RES SMD 4.99K OHM 1% 1/16W 0402", P&V Description="Resistor, Thick Film, 4.99k Ohms, 0.063W, 1% Tol, RES SMD 4.99K OHM 1% 1/16W 0402, 0402, SMD", Parent Key=1871, SMD=True, Type="Thick Film", VENDOR=Digikey, VENDOR_PN=311-4.99KLRCT-ND, Verified=False
R16 R17: library part 1892, Package=0402, Power=0.0625, Tolerance=1, Approved=False, Class=Resistor, Date Modified="12/12/2018 9:31:20 AM", Expr1026=1892, Key=1892, MANF="Stackpole Electronics", MANF_PN=RMCF0402FT2K32, MENG_PN=1892, Modified By=khall, Other="2.32 kOhms ±1% 0.063W, 1/16W Chip Resistor 0402 (1005 Metric) Automotive AEC-Q200 Thick Film", P&V Description="Resistor, Thick Film, 2.32k Ohms, 0.0625W, 1% Tol, 2.32 kOhms ±1% 0.063W, 1/16W Chip Resistor 0402 (1005 Metric) Automotive AEC-Q200 Thick Film, 0402, SMD", Parent Key=1892, SMD=True, Type="Thick Film", VENDOR=Digikey, VENDOR_PN=RMCF0402FT2K32CT-ND, Verified=False
S1 S2 S3 S4: library part 1672, Package=6x6mm, Approved=False, Class=Switch, Date Modified="5/24/2018 2:12:47 PM", Key=1672, MANF="C&K Components", MANF_PN="PTS645SK50SMTR92 LFS", MENG_PN=???1672, Modified By=jrowley, Other="Top Actuated, 0.05A, 260 grams, No Pegs, No ESD", P&V Description="Switch, Tactile, Top Actuated, 0.05A, 260 grams, No Pegs, No ESD, 6x6mm, SMD", Parent Key=1672, SMD=True, Type=Tactile, VENDOR=Digikey, VENDOR_PN=CKN9087CT-ND, Verified=True
U1: "Single ADC Pipelined 250Msps 8-bit Parallel/LVDS 44-Pin TQFP Tray", MANF="Analog Devices Inc.", MANF_PN=AD9481BSUZ-250, VENDOR=DigiKey, VENDOR_PN=AD9481BSUZ-250-ND
U2: library part MachXO2-4000-TG144, MANF="Lattice Semiconductor Corporation", MANF_PN=LCMXO2-4000HC-4TG144C, VENDOR=DigiKey, VENDOR_PN=220-1460-ND
U3: library part PIC32MZ2048EFH064-I/PT, "Microchip PIC32MZ EF Series 64-pin", MANF="Microchip Technology", MANF_PN=PIC32MZ2048EFH064-I/PT, VENDOR=DigiKey, VENDOR_PN=PIC32MZ2048EFH064-I/PT-ND
U4: library part S70KS, MANF=Cypress, MANF_PN=S70KS1281DPBHV020, VENDOR=DigiKey, VENDOR_PN=2015-S70KS1281DPBHV020-ND
U6: library part 690, Package=DPAK-3, Approved=True, Class=IC, Date Modified="4/8/2011 3:28:12 PM", Key=690, MANF="ST Microelectronics", MANF_PN=LD1086D2M33TR, MENG_PN=ANG00046, Modified By=cschneiker, Other="3.3V, 1.5A max Iout, 30V Max Vin", P&V Description="IC, Voltage Regulator, 3.3V, 1.5A max Iout, 30V Max Vin, DPAK-3, SMD", Parent Key=690, SMD=True, Type="Voltage Regulator", VENDOR=Digikey, VENDOR_PN=497-1223-1-ND, Verified=True
U7: library part 2055, Package=4-SMD, Approved=False, Class=IC, Date Modified="6/13/2019 1:30:40 AM", Key=2055, MANF=Microchip, MANF_PN=DSC6011JI1A-024.0000, MENG_PN=???2055, Modified By=jrowley, Other="24MHz XO (Standard) CMOD Oscillator, 1.71-3.63V, Standby (Power Down)", P&V Description="IC, Oscillator, 24MHz XO (Standard) CMOD Oscillator, 1.71-3.63V, Standby (Power Down), 4-SMD, SMD", Parent Key=2055, SMD=True, Type=Oscillator, VENDOR=Digikey, VENDOR_PN=DSC6011JI1A-024.0000-ND, Verified=False
U8: library part 2056, Package=WDFN-8, Approved=False, Class=IC, Date Modified="6/13/2019 8:04:40 AM", Key=2056, MANF="On Semiconductor", MANF_PN=EMI2121MTTAG, MENG_PN=???2056, Modified By=jrowley, Other="USB Common-Mode Filter and ESD Protection", P&V Description="IC, Channel Protector, USB Common-Mode Filter and ESD Protection, WDFN-8, SMD", Parent Key=2056, SMD=True, Type="Channel Protector", VENDOR=Digikey, VENDOR_PN=EMI2121MTTAGOSCT-ND, Verified=False
U9: library part 2073, Package=SOT-23, Approved=False, Class=IC, Date Modified="6/21/2019 8:23:33 PM", Key=2073, MANF=Microchip, MANF_PN=MCP1703T-1802E/CB, MENG_PN=???2073, Modified By=jrowley, Other="1.8Vout, 2.7-16Vin, 200mA, -40°C ~ 125°C", P&V Description="IC, Voltage Regulator, 1.8Vout, 2.7-16Vin, 200mA, -40°C ~ 125°C, SOT-23, SMD", Parent Key=2073, SMD=True, Type="Voltage Regulator", VENDOR=Digikey, VENDOR_PN=MCP1703T-1802E/CBCT-ND, Verified=False
U5: MANF="Microchip Technology", MANF_PN=DSC1103CI3-250.0000, VENDOR=Mouser, VENDOR_PN=579-1103CI32500000

## Via types
v1: diameter 24, hole 12, Top Layer to Bottom Layer, 350 vias
v2: diameter 24, hole 12, Top Layer to Bottom Layer, tented top, 12 vias

## Nets (pads, with @x,y where several pads share a name; then routed paths per layer and width w, separated by ;. In a path a pad name is that pad's centre, name@x,y a point inside that pad or via, vN(x,y) a via of type N, cw(c..) or ccw(c..) an arc to the next point about the centre after c; other vN are vias at no path point)
+1.8V: +1.8V.1 C21.2 C22.2 C23.2 C29.2 C32.2 C50.2 C51.2 C52.2 C53.2 P9.3 U2.79 U2.88 U2.102 U4.B4 U4.D1 U4.E4 U9.2 | length 2577.2
  Top Layer w8: U2.79@6323.51,5679.13 v1(6387.8,5679.13) ; U2.88@6323.51,5856.3 v1(6387.8,5856.3) ; U2.102@6323.51,6131.89 v1(6387.8,6131.89) ; 6791.34,5866.14 U4.D1@6811.02,5866.14 ; 6929.13,5807.09 U4.E4@6929.13,5826.77 ; U4.B4@6929.13,5944.88 6948.82,5964.57 v1(7027.56,5964.57)
  Top Layer w12: v1(6387.8,5679.13) C52.2@6433.07,5679.13 ; v1(6387.8,5856.3) C51.2@6433.07,5856.3 ; v1(6387.8,6131.89) 6393.7,6137.8 C50.2@6427.17,6137.8 ; v1(6515.75,5895.67) 6561.02,5895.67 C53.2@6570.87,5885.83 ; v1(6692.91,5875.98) 6702.76,5866.14 6791.34,5866.14 ; C21.2@6883.86,5708.66 v1(6929.13,5708.66) 6929.13,5807.09 ; v1(7027.56,5964.57) 7047.24,5964.57 7057.09,5954.72 C23.2@7057.09,5929.13
  Top Layer w20: C32.2@6828.75,6633.86 U9.2@6828.74,6704.72 6828.74,7332.28 P9.3@7183.46,7687.01
  Top Layer w25: v1(6826.77,6112.21) C29.2@6895.67,6112.2 ; v1(6828.75,6161.42) C32.2@6828.75,6633.86
  other v1: 6846.46,6112.2 6828.75,6181.1 6828.75,6200.79
+3.3V: +3.3V.1 C1.2 C2.2 C3.2 C4.2 C5.2 C6.2 C7.2 C8.2 C10.2 C14.2 C15.2 C16.2 C17.2 C18.2 C19.2 C20.2 C25.2 C27.2 C28.2 C30.2 C31.2 C41.2 C42.2 C43.2 C44.2 C46.2 C47.2 C48.2 C49.2 C54.2 C55.2 C56.2 C57.2 C58.2 C59.2 C60.2 C61.2 P1.2 P4.1 P5.1 P6.1 P7.1 P9.2 P10.1 R3.2 R7.1 R8.1 R12.2 R13.2 R14.2 R16.2 R17.2 U1.3 U1.5 U1.18 U1.30 U1.31 U1.36 U1.41 U1.42 U1.43 U2.7 U2.16 U2.30 U2.36 U2.37 U2.51 U2.66 U2.72 U2.108 U2.118 U2.123 U2.135 U2.144 U3.8 U3.19 U3.26 U3.34 U3.39 U3.54 U3.60 U5.1 U5.6 U6.2 U6.4 U7.1 U7.4 U9.3 | length 5172.9
  Top Layer w8: v1(4594.49,6222.44) U7.1@4677.17,6222.44 ; v1(4704.72,5925.2) 4714.57,5935.04 U3.39@4747.05,5935.04 ; v1(4704.72,6023.62) 4714.57,6033.46 U3.34@4747.05,6033.46 ; 4872.05,5708.66 U3.54@4872.05,5731.3 ; U3.26@4891.73,6079.72 4891.73,6112.2 v1(4901.57,6122.05) ; v1(4976.88,5692.43) 4990.16,5705.71 U3.60@4990.16,5731.3 ; U3.19@5029.53,6079.72 v1(5029.53,6122.05) ; U3.8@5095.47,5895.67 5127.95,5895.67 v1(5137.8,5885.83) ; v1(5131.89,7062.99) R8.1@5167.32,7062.99 ; v1(5433.07,5688.98) 5442.91,5679.13 U2.30@5487.51,5679.13 ; v1(5433.07,5954.72) U2.16@5487.51,5954.72 ; v1(5433.07,6125.98) 5438.98,6131.89 U2.7@5487.51,6131.89 ; v1(5462.6,5531.5) 5472.44,5531.5 5487.51,5546.57 U2.36@5487.51,5561.02 ; v1(5531.5,6338.58) 5546.57,6323.51 U2.144@5561.02,6323.51 ; C54.2@5561.02,5413.39 U2.37@5561.02,5487.51 ; U2.135@5738.19,6323.51 v1(5738.19,6387.8) ; C55.2@5836.61,5407.48 U2.51@5836.61,5487.51 ; v1(5968.5,6377.95) 5974.41,6372.05 U2.123@5974.41,6323.51 ; U1.42@5999.51,4700.26 5999.51,4610.72 v1(6013.78,4596.46) 6031.51,4614.19 U1.43@6031.51,4700.26 ; U2.118@6072.83,6323.51 6072.83,6377.95 v2(6082.66,6387.78) ; v1(6131.89,5433.07) U2.66@6131.89,5487.51 ; v1(6139.76,4496.06) U5.1@6139.76,4604.33 ; v1(6250,5437.01) U2.72@6250,5487.51 ; U2.108@6323.51,6250 6323.51,6264.46 v1(6338.58,6279.53)
  Top Layer w12: P1.2@4035.43,5029.53 4143.7,5029.53 4159.45,5045.28 R3.2@4271.65,5045.28 ; C30.2@4576.77,5850.39 v1(4620.08,5850.39) ; C16.2@4663.39,5925.2 v1(4704.72,5925.2) ; C17.2@4669.29,6023.62 v1(4704.72,6023.62) ; C10.2@4738.19,6289.37 4738.19,6255.91 4751.97,6242.13 U7.4@4751.97,6222.44 v1(4751.97,6179.13) ; 4872.05,5708.66 4872.05,5669.29 v1(4881.89,5659.45) 4891.73,5659.45 C15.2@4914.4,5636.78 ; v1(4901.57,6122.05) C18.2@4901.57,6157.48 ; v1(4976.88,5692.43) 4976.88,5662.88 C14.2@4983.3,5656.47 ; C19.2@5012.82,6164.4 5029.53,6147.7 v1(5029.53,6122.05) ; R16.2@5035.83,4479.33 R17.2@5135.83,4479.33 ; v1(5124.02,5141.73) R7.1@5167.32,5141.73 ; v1(5137.8,5885.83) C20.2@5173.23,5885.83 ; C61.2@5236.22,6125.98 v1(5236.22,6171.26) ; C60.2@5393.7,6125.98 v1(5433.07,6125.98) ; C59.2@5397.64,5954.72 v1(5433.07,5954.72) ; C44.2@5462.6,5496.06 v1(5462.6,5531.5) ; C41.2@5486.22,6338.58 v1(5531.5,6338.58) ; v1(5541.34,5374.02) 5561.02,5393.7 C54.2@5561.02,5413.39 ; C6.2@5574.8,4803.15 v1(5620.08,4803.15) 5644.19,4827.26 v1(5737.76,4827.26) ; C7.2@5574.8,4852.36 v1(5620.08,4852.36) 5625.98,4858.26 v1(5737.76,4858.26) ; v1(5675.2,6568.9) C49.2@5675.2,6614.17 ; v1(5738.19,6387.8) 5744.09,6393.7 C46.2@5777.56,6393.7 ; v1(5811.51,4753.5) 5811.51,4660.93 v1(5826.77,4645.67) ; R14.2@5860.24,7372.05 R13.2@5950.79,7372.05 ; v1@5874.51,5090.06 U1.18@5874.51,5142.26 ; v1(5954.72,4645.67) 5968.51,4659.46 v1(5968.51,4753.5) ; v1(5968.5,6377.95) C47.2@5968.5,6413.39 ; C57.2@6017.76,5348.47 v1(6053.15,5313.07) ; C8.2@6072.83,4620.08 6072.83,4645.67 v1(6092.52,4665.35) U5.6@6137.8,4665.35 ; v1(6073.27,4827.26) 6176.68,4827.26 v1(6181.1,4822.83) C3.2@6226.38,4822.83 ; v1(6073.27,4890.26) 6179.63,4890.26 v1(6181.1,4891.73) C2.2@6226.38,4891.73 ; v2(6082.66,6387.78) 6088.58,6393.7 C48.2@6112.2,6393.7 ; v1(6131.89,5433.07) 6131.89,5403.54 C56.2@6144.71,5390.72 ; v1(6250,5437.01) C43.2@6279.53,5407.48 ; P5.1@6254.72,7687.01 6254.72,7485.43 6263.78,7476.38 R12.2@6263.78,7372.05 ; v1(6338.58,6279.53) C42.2@6338.58,6324.8 ; v1(7253.94,6958.66) v1(7253.94,6998.03)
  Top Layer w20: U9.3@6791.34,6779.53 C31.2@6791.34,6850.39
  Top Layer w25: C31.2@6791.34,6850.39 v1(6791.34,6938.98) ; C25.2@7253.94,6480.31 U6.2@7253.94,6622.05 v1(7253.94,6958.66)
  Bottom Layer w12: v1(5433.07,5688.98) 5478.35,5688.98 C58.2@5482.28,5685.04 ; v1(5874.51,5088.58) 5897.64,5111.71 C1.2@5897.64,5147.64
  other v1: 5085.04,4479.33 5791.34,4598.43 5862.2,4598.43 5413.39,4744.09 5460.63,4751.97 5374.02,4783.46 6437.01,4891.73 6358.27,4921.26 6407.48,4931.1 6791.34,6899.61 6791.34,6919.29 7175.2,6958.66 7214.57,6958.66 7293.31,6958.66 7332.68,6958.66 7175.2,6998.03 7214.57,6998.03 7293.31,6998.03 7332.68,6998.03 7175.2,7037.4 7214.57,7037.4 7253.94,7037.4 7293.31,7037.4 7332.68,7037.4 5905.51,7372.05
  other v2: 5836.61,5440.94
+5V_USB: +5V_USB.1 C12.2 C13.2 C26.2 D4.2 L7.2 P9.1 U3.33 U6.3 | length 8018.9
  Top Layer w8: 4714.57,6053.15 U3.33@4747.05,6053.15
  Top Layer w12: C12.2@4192.91,6098.43 4192.91,6066.93 v1(4206.69,6053.15) ; L7.2@4246.06,6003.94 v1(4246.06,6053.15) 4261.81,6068.9 C13.2@4261.81,6098.43 ; 4480,6129.92 D4.2@4480,6191.42 ; 4532.99,6102.36 4556.99,6078.36 4689.35,6078.36 4714.57,6053.15 ; C26.2@7353.94,6480.31 7496.06,6480.31 +5V_USB.1@7677.17,6299.21
  Top Layer w25: v1(4206.69,6053.15) v1(4226.38,6053.15) v1(4246.06,6053.15) 4281.5,6053.15 4330.71,6102.36 4480,6102.36 ; 4480,6129.92 4480,6102.36 ; 4532.99,6102.36 4480,6102.36 ; C26.2@7353.94,6480.31 U6.3@7353.94,6622.05 ; U6.3@7353.94,6624.02 v1(7411.42,6624.02) ; v1(7411.42,6604.33) v1(7411.42,6624.02) ; v1(7411.42,6643.7) v1(7411.42,6624.02)
  Bottom Layer w25: v1(4246.06,6053.15) v1(4226.38,6053.15) v1(4206.69,6053.15) 4114.17,6053.15 3966.54,6200.79 3966.54,7746.06 4064.96,7844.49 7322.83,7844.49 7383.46,7783.86 P9.1@7383.46,7687.01 7383.46,6671.65 v1(7411.42,6643.7) v1(7411.42,6624.02) v1(7411.42,6604.33)
\M\C\L\R: P1.1 R3.1 S3.1 U3.9 | length 3817.4
  Top Layer w8: U3.9@5095.47,5915.35 5169.02,5915.35 5206.69,5953.03 v1(5206.69,5984.25)
  Top Layer w12: v1(4311.02,5092.52) R3.1@4271.65,5092.52 4157.48,5092.52 4143.7,5078.74 P1.1@4035.43,5078.74 4005.91,5078.74 3986.22,5059.06 3986.22,4763.78 4074.8,4675.2 4704.72,4675.2 4764.76,4735.24 S3.1@4764.76,4812.99 S3.1@5077.76,4812.99
  Signal Layer 1 w8: v1(4458.66,6023.62) 4494.66,5987.62 4768.44,5987.62 4782.44,5973.62 5060.08,5973.62 5105.92,6019.46 5120.68,6019.46 5155.9,5984.25 v1(5206.69,5984.25)
  Bottom Layer w12: v1(4311.02,5092.52) 4320.87,5102.36 4320.87,5149.34 4376.55,5205.03 4376.55,5864.47 4458.66,5946.58 v1(4458.66,6023.62)
\P\M\W\R: U2.24 U3.53 | length 867.6
  Top Layer w8: U3.53@4852.36,5731.3 4852.36,5649.61 4946.63,5555.34 5082.9,5555.34 v1(5098.42,5570.86) ; v1(5216.54,5570.87) 5216.54,5590.44 5423.34,5797.24 U2.24@5487.51,5797.24
  Signal Layer 2 w8: v1(5098.42,5570.86) v1(5216.54,5570.87)
ADC_D0A: U1.14 U2.42 | length 665.8
  Top Layer w8: U2.42@5659.45,5487.51 5659.45,5413.39 5708.66,5364.17 v1(5708.66,5206.69) ; v1(5954.72,5206.69) 5984.25,5206.69 5999.51,5191.43 U1.14@5999.51,5142.26
  Signal Layer 2 w8: v1(5708.66,5206.69) 5730.66,5184.69 5932.72,5184.69 v1(5954.72,5206.69)
ADC_D0B: U1.19 U2.43 | length 412.9
  Top Layer w8: U2.43@5679.13,5487.51 5679.13,5433.07 5738.19,5374.02 5738.19,5311.13 5842.51,5206.81 U1.19@5842.51,5142.26
ADC_D1A: U1.13 U2.47 | length 561.2
  Top Layer w8: U2.47@5757.87,5487.51 5757.87,5311.24 5842.74,5226.38 v1(5875.98,5226.38) ; v1(5994.09,5236.22) 6031.51,5198.8 U1.13@6031.51,5142.26
  Signal Layer 2 w8: v1(5875.98,5226.38) 5925.2,5226.38 5935.04,5236.22 v1(5994.09,5236.22)
ADC_D1B: U1.20 U2.48 | length 385.9
  Top Layer w8: U2.48@5777.56,5487.51 5777.56,5314.96 5826.77,5265.75 v1(5836.61,5265.75) ; U1.20@5811.51,5142.26 v1(5811.51,5206.69)
  Signal Layer 2 w8: v1(5811.51,5206.69) 5836.61,5231.8 v1(5836.61,5265.75)
ADC_D2A: U1.12 U2.52 | length 464.3
  Top Layer w8: U2.52@5856.3,5487.51 5856.3,5452.76 5860.39,5448.66 5860.39,5360.08 5873.67,5346.8 5881.16,5346.8 5969.74,5258.22 6019.72,5258.22 6062.51,5215.43 U1.12@6062.51,5142.26
ADC_D2B: U1.21 U2.54 | length 414.7
  Top Layer w8: v1(5767.72,5226.38) 5779.51,5214.58 U1.21@5779.51,5142.26 ; v1(5895.67,5374.02) U2.54@5895.67,5487.51
  Signal Layer 2 w8: v1(5767.72,5226.38) 5767.72,5265.75 5875.98,5374.02 v1(5895.67,5374.02)
ADC_D3A: U1.11 U2.57 | length 480.4
  Top Layer w8: U2.57@5954.72,5487.51 5954.72,5364.17 6126.51,5192.39 U1.11@6126.51,5078.26
ADC_D3B: U1.22 U2.58 | length 556.7
  Top Layer w8: v1(5738.19,5265.75) 5738.19,5206.69 5748.51,5196.37 U1.22@5748.51,5142.26 ; U2.58@5974.41,5487.51 5974.41,5414.86 5984.25,5405.01 v1(5984.25,5388.78)
  Signal Layer 2 w8: v1(5738.19,5265.75) 5738.19,5305.12 5829.09,5396.02 5977.02,5396.02 v1(5984.25,5388.78)
ADC_D4A: U1.10 U2.59 | length 565.4
  Top Layer w8: U2.59@5994.09,5487.51 5994.09,5414.97 6181.1,5227.96 6181.1,5059.06 6169.31,5047.26 U1.10@6126.51,5047.26
ADC_D4B: U1.23 U2.60 | length 729.8
  Top Layer w8: U1.23@5684.51,5078.26 v1(5684.51,5310.5) ; U2.60@6013.78,5487.51 6013.78,5423.23 6033.46,5403.54 v1(6038.39,5403.54)
  Signal Layer 2 w8: v1(5684.51,5310.5) 5787.4,5413.39 6023.62,5413.39 6033.46,5403.54 v1(6038.39,5403.54)
ADC_D5A: U1.9 U2.61 | length 601.7
  Top Layer w8: U2.61@6033.46,5487.51 6033.46,5439.58 6060.39,5412.66 6060.39,5376.62 6200.79,5236.22 6200.79,5039.37 6176.68,5015.26 U1.9@6126.51,5015.26
ADC_D5B: U1.24 U2.62 | length 927.8
  Top Layer w8: v1(5659.45,5344.49) 5629.92,5314.96 5629.92,5059.06 5641.72,5047.26 U1.24@5684.51,5047.26 ; U2.62@6053.15,5487.51 6053.15,5443.03 6063.11,5433.07 v1(6082.68,5433.07)
  Signal Layer 2 w8: v1(5659.45,5344.49) 5787.4,5472.44 6043.31,5472.44 v1(6082.68,5433.07)
ADC_D6A: U1.8 U2.65 | length 623.2
  Top Layer w8: U2.65@6112.2,5487.51 6112.2,5444.5 6109.89,5442.18 6109.89,5356.65 6220.47,5246.06 6220.47,5019.69 6185.05,4984.26 U1.8@6126.51,4984.26
ADC_D6B: U1.25 U2.67 | length 1256
  Top Layer w8: v1(5610.24,5344.49) 5610.24,5039.37 5634.35,5015.26 U1.25@5684.51,5015.26 ; U2.67@6151.57,5487.51 6151.57,5444.5 6153.89,5442.18 6153.89,5419.21 6199.09,5374.02 v1(6210.63,5374.02)
  Signal Layer 2 w8: v1(5610.24,5344.49) 5757.87,5492.13 6112.09,5492.13 6178.79,5425.43 6178.79,5405.86 v1(6210.63,5374.02)
ADC_D7A: U1.7 U2.68 | length 662.9
  Top Layer w8: U1.7@6126.51,4952.26 6192.42,4952.26 6240.16,5000 6240.16,5375.6 6219.74,5396.02 6196.89,5396.02 6171.26,5421.64 U2.68@6171.26,5487.51
ADC_D7B: U1.26 U2.69 | length 1259.8
  Top Layer w8: v1(5561.02,5344.49) 5590.55,5314.96 5590.55,5019.69 5625.98,4984.26 U1.26@5684.51,4984.26 ; U2.69@6190.94,5487.51 6190.94,5433.07 v1(6200.79,5423.23)
  Signal Layer 2 w8: v1(5561.02,5344.49) 5728.35,5511.81 6112.2,5511.81 v1(6200.79,5423.23)
ADC_DCO_N: U1.16 U2.50 | length 408.9
  Top Layer w8: U2.50@5816.93,5487.51 5816.93,5451.15 5812.83,5447.06 5812.83,5334.89 5834.13,5313.59 5852.15,5313.59 5862.93,5302.8 5863.14,5302.8 5921.51,5244.43 5921.51,5200.54 5936.51,5185.54 U1.16@5936.51,5142.26
ADC_DCO_P: U1.17 U2.49 | length 401.1
  Top Layer w8: U2.49@5797.24,5487.51 5797.24,5454.09 5796.83,5453.68 5796.83,5328.26 5827.5,5297.59 5845.52,5297.59 5856.31,5286.8 5856.51,5286.8 5905.51,5237.81 U1.17@5905.51,5142.26
ADC_IN_N: IN-.1 U1.38 | length 731
  Top Layer w8: IN-.1@5708.66,4133.86 5856.3,4133.86 5885.83,4163.39 5885.83,4635.83 5874.51,4647.14 U1.38@5874.51,4700.26
ADC_IN_P: IN+.1 U1.39 | length 746
  Top Layer w8: U1.39@5905.51,4700.26 5905.51,4163.39 5935.04,4133.86 IN+.1@6102.36,4133.86
ADC_OSC_N: R1.2 U1.2 U5.5 | length 249.4
  Top Layer w8: U1.2@6126.51,4795.26 6094.47,4795.26 6082.68,4783.46 6082.68,4744.09 6102.36,4724.41 R1.2@6177.17,4724.41 6181.1,4720.47 U5.5@6181.1,4667.32
ADC_OSC_P: R1.1 U1.1 U5.4 | length 185.7
  Top Layer w8: U1.1@6126.51,4764.26 6210.15,4764.26 6222.44,4751.97 U5.4@6222.44,4667.32
D+: P3.2 U8.1 | length 329.1
  Top Layer w8: P3.2@4101.38,5931.1 4238.19,5931.1 4303.15,5996.06 U8.1@4403.54,5996.06
D+_filt: U3.37 U8.7 | length 292.3
  Top Layer w8: U8.7@4454.72,5974.41 U3.37@4747.05,5974.41
D-: P3.3 U8.2 | length 330.7
  Top Layer w8: P3.3@4101.38,5905.51 4242.13,5905.51 4311.02,5974.41 U8.2@4403.54,5974.41
D-_filt: U3.36 U8.8 | length 292.3
  Top Layer w8: U8.8@4454.72,5994.09 U3.36@4747.05,5994.09
DAC_RDY: P8.5 U3.30 | length 2397.6
  Top Layer w8: U3.30@4812.99,6079.72 v1(4812.99,6122.05)
  Signal Layer 2 w8: v1(4812.99,6122.05) 4834.99,6100.05 4834.99,5612.55 v1(4832.68,5610.24)
  Bottom Layer w12: v1(4832.68,5610.24) 4502.55,5280.11 4502.55,4333.66 4639.21,4197 4762.84,4197 P8.5@4835.83,4124.02
EXIO0: P6.2 U3.11 | length 3515.2
  Top Layer w8: U3.11@5095.47,5954.72 v1(5157.48,5954.72)
  Signal Layer 1 w8: v1(4419.29,6023.62) 4469.29,5973.62 4762.64,5973.62 4776.64,5959.62 5123.06,5959.62 5127.95,5954.72 v1(5157.48,5954.72)
  Bottom Layer w12: v1(4419.29,6023.62) 4350.39,6092.52 4133.86,6092.52 4005.91,6220.47 4005.91,7352.36 4458.66,7805.12 4711.02,7805.12 P6.2@4829.13,7687.01
EXIO1: P6.3 U3.17 | length 1782.3
  Top Layer w8: U3.17@5068.9,6079.72 5085.63,6079.72 5098.43,6092.52 5098.43,6210.63 v1(5088.58,6220.47)
  Signal Layer 2 w8: P6.3@4729.13,7687.01 4811.46,7604.68 4811.46,6497.59 v1(5088.58,6220.47)
EXIO2: P6.4 U3.22 | length 1750.6
  Top Layer w8: U3.22@4970.47,6079.72 4970.47,6110.62 4972.79,6112.93 4972.79,6168.94 v1(4972.06,6169.67)
  Signal Layer 2 w8: P6.4@4629.13,7687.01 4797.46,7518.68 4797.46,6491.79 4972.06,6317.2 v1(4972.06,6169.67)
EXIO3: P6.5 U3.28 | length 1743.1
  Top Layer w8: v1(4783.46,6446.85) 4783.46,6240.16 4820.52,6203.1 4820.52,6201.52 4854.68,6167.36 4854.68,6082.04 U3.28@4852.36,6079.72
  Signal Layer 2 w8: P6.5@4529.13,7687.01 4783.46,7432.68 v1(4783.46,6446.85)
FDIO0_N: P4.4 U2.113 | length 2738.3
  Top Layer w8: U2.113@6171.26,6323.51 6171.26,6386.21 6173.57,6388.53 6173.57,6406.75 6171.26,6409.07 v1(6171.26,6437.01)
  Signal Layer 2 w8: v1(6171.26,6437.01) 6171.26,6409.07 6173.57,6406.75 6173.57,6388.53 6171.26,6386.21 6171.26,5757.87 7200,4729.13 P4.4@7687.01,4729.13
FDIO0_P: P4.3 U2.114 | length 2730.9
  Top Layer w8: U2.114@6151.57,6323.51 v1(6151.57,6397.64)
  Signal Layer 2 w8: v1(6151.57,6397.64) 6151.57,6400.11 6155.26,6403.8 6155.26,5751.25 7193.37,4713.13 7603.01,4713.13 P4.3@7687.01,4629.13
FDIO1_N: P4.7 U2.111 | length 2634.7